# Altium PCB linkit-v4-1.1_6layers_smdonly.PcbDoc (part 1 of 5)
Units mm, origin at the board's own origin, x right, y up, seen from the top; angles counter-clockwise.
Board outline 70 x 35 mm, 6 copper layers (Top Layer, Int1 (GND), Int2 (Sign), Int3 (Sign), Int4 (PWR), Bottom Layer), stack 1.649 mm thick; 203 components, 154 nets, 694 pads, 939 vias.
Unrouted connection lines stored in the file: 1.
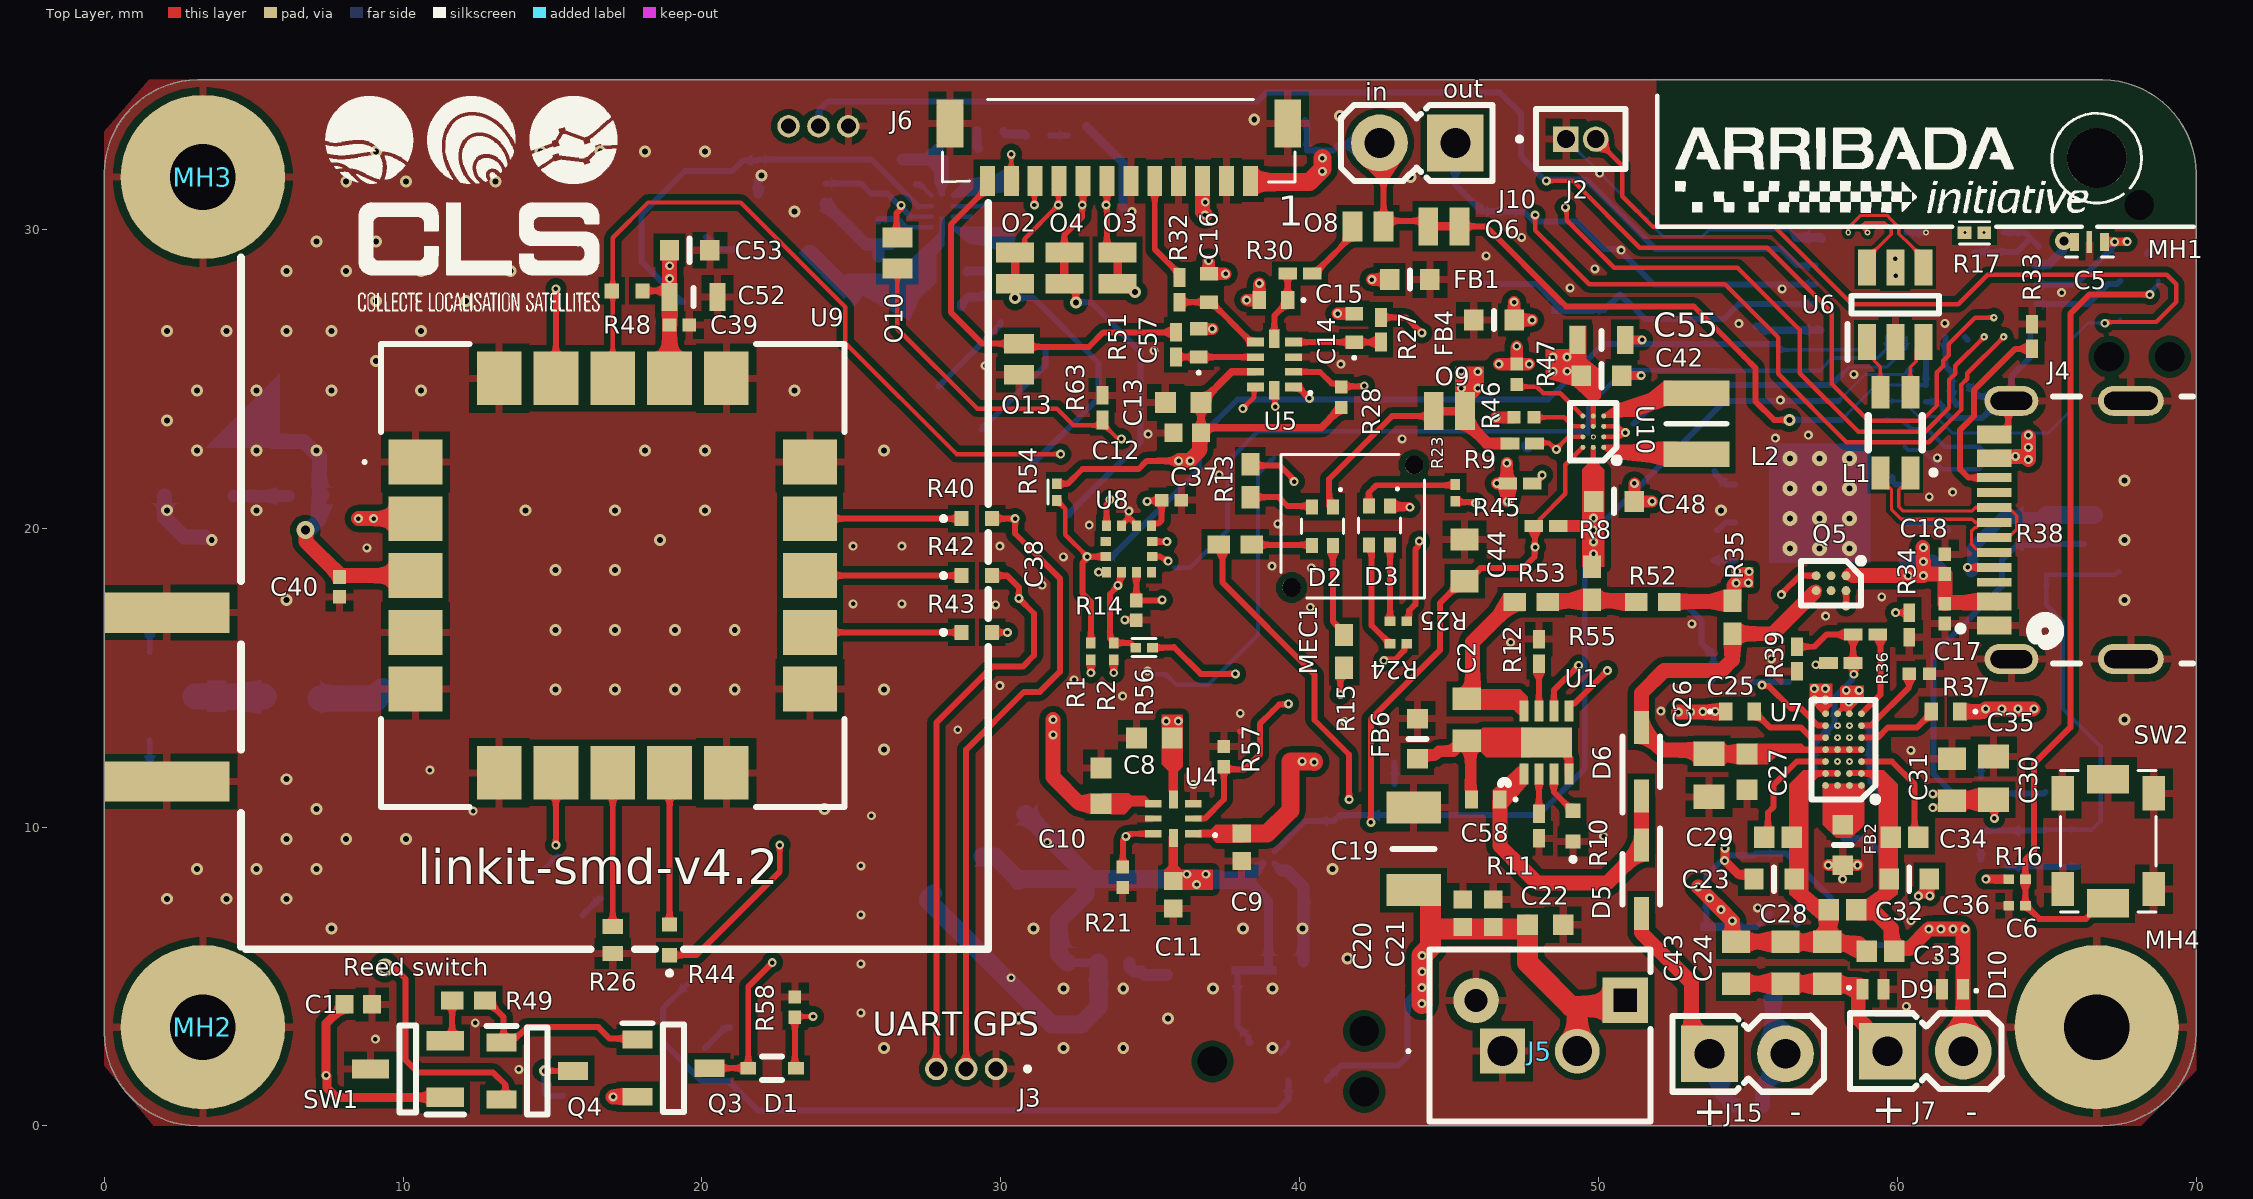
[diagram p0: Top Layer view]
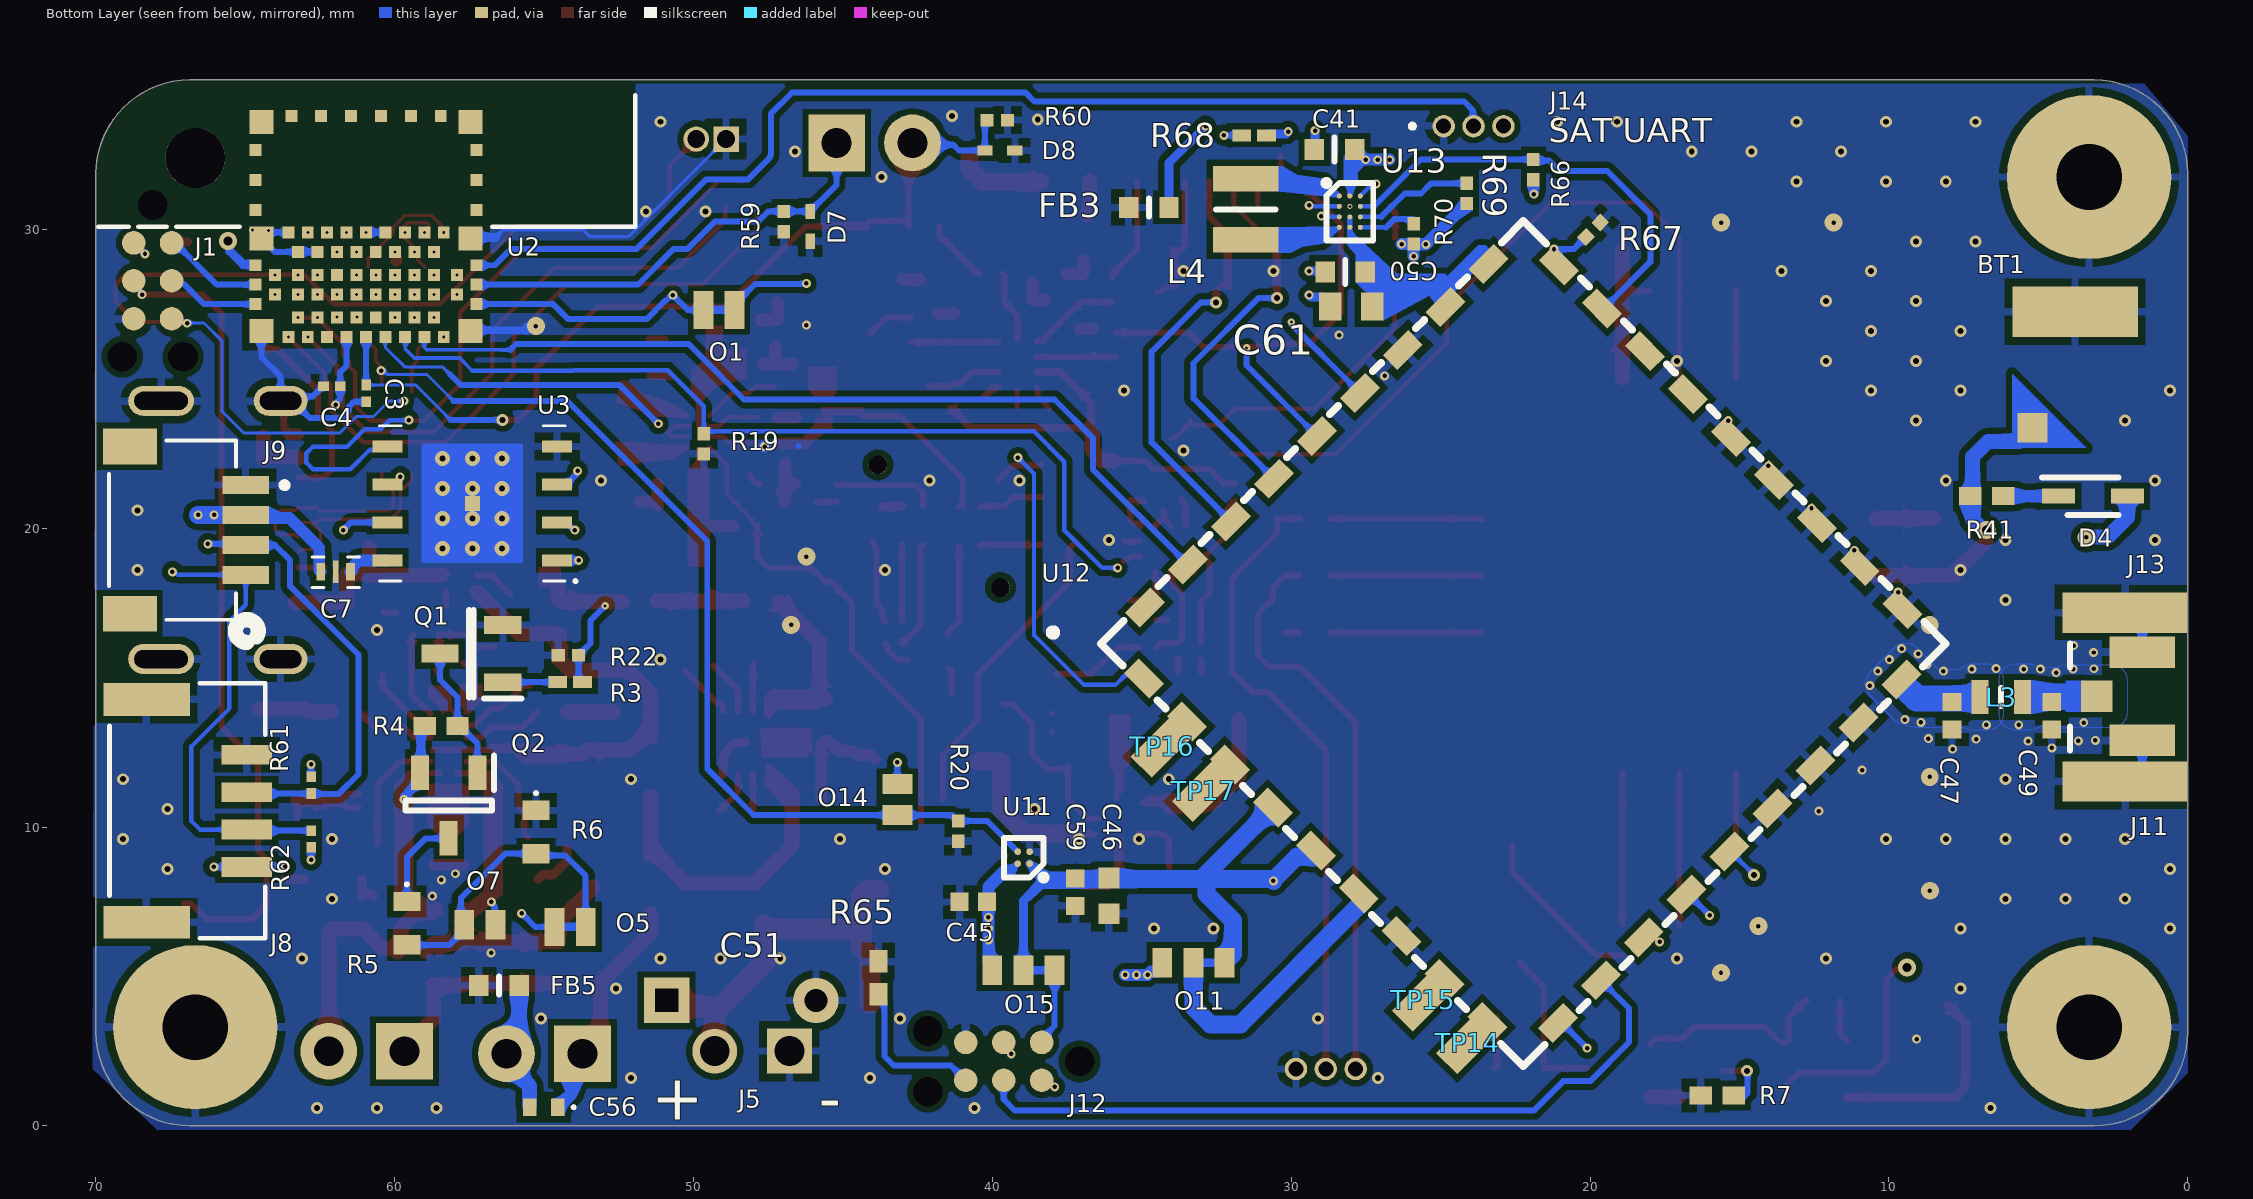
[diagram p1: Bottom Layer view, seen from below]
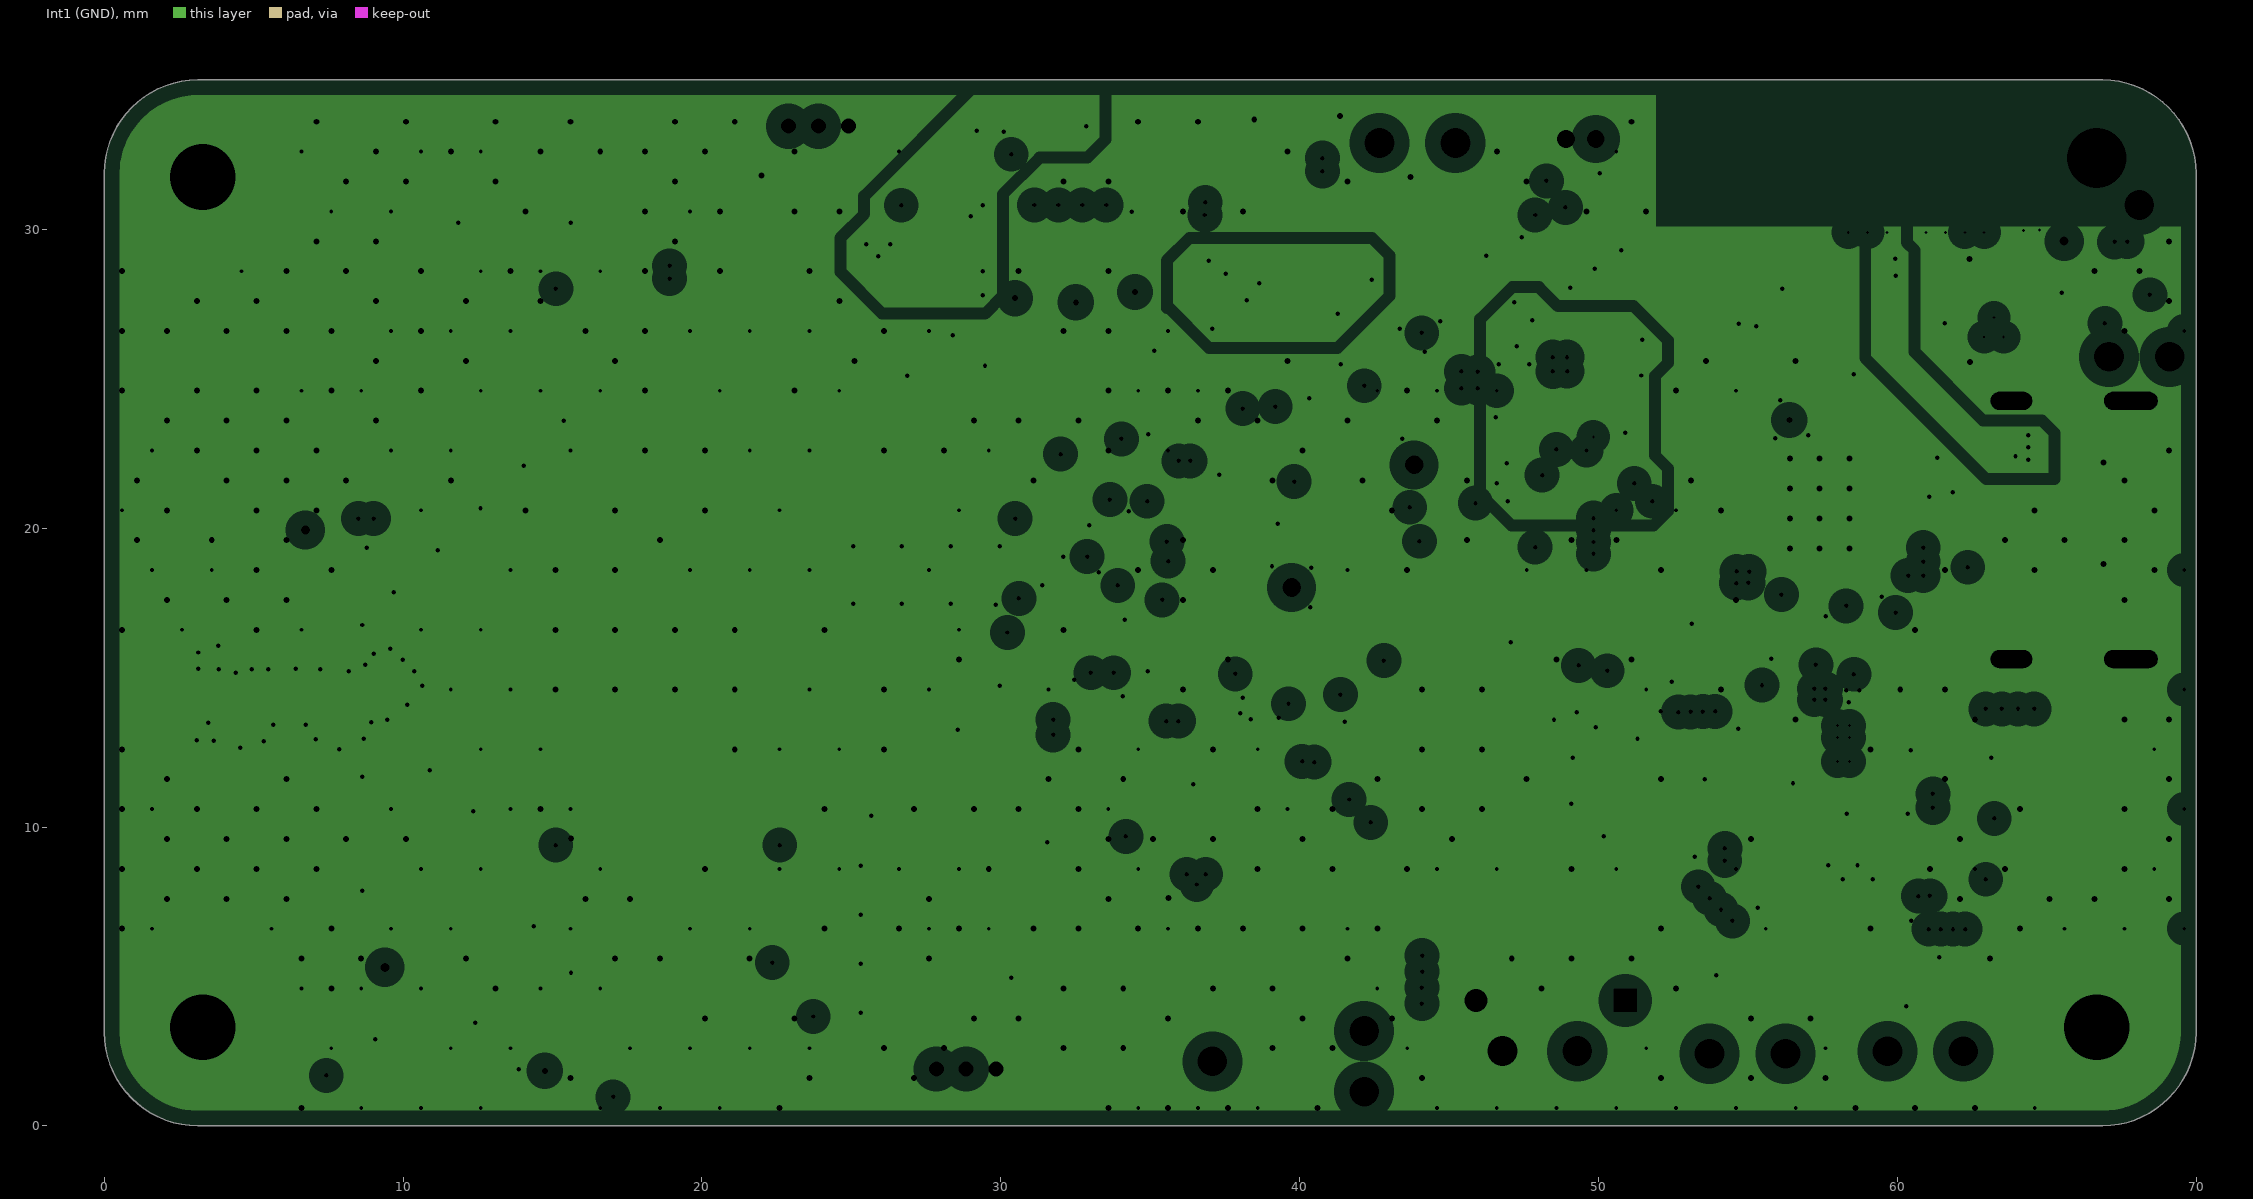
[diagram p2: Int1 (GND), clearances drawn from the general rule]
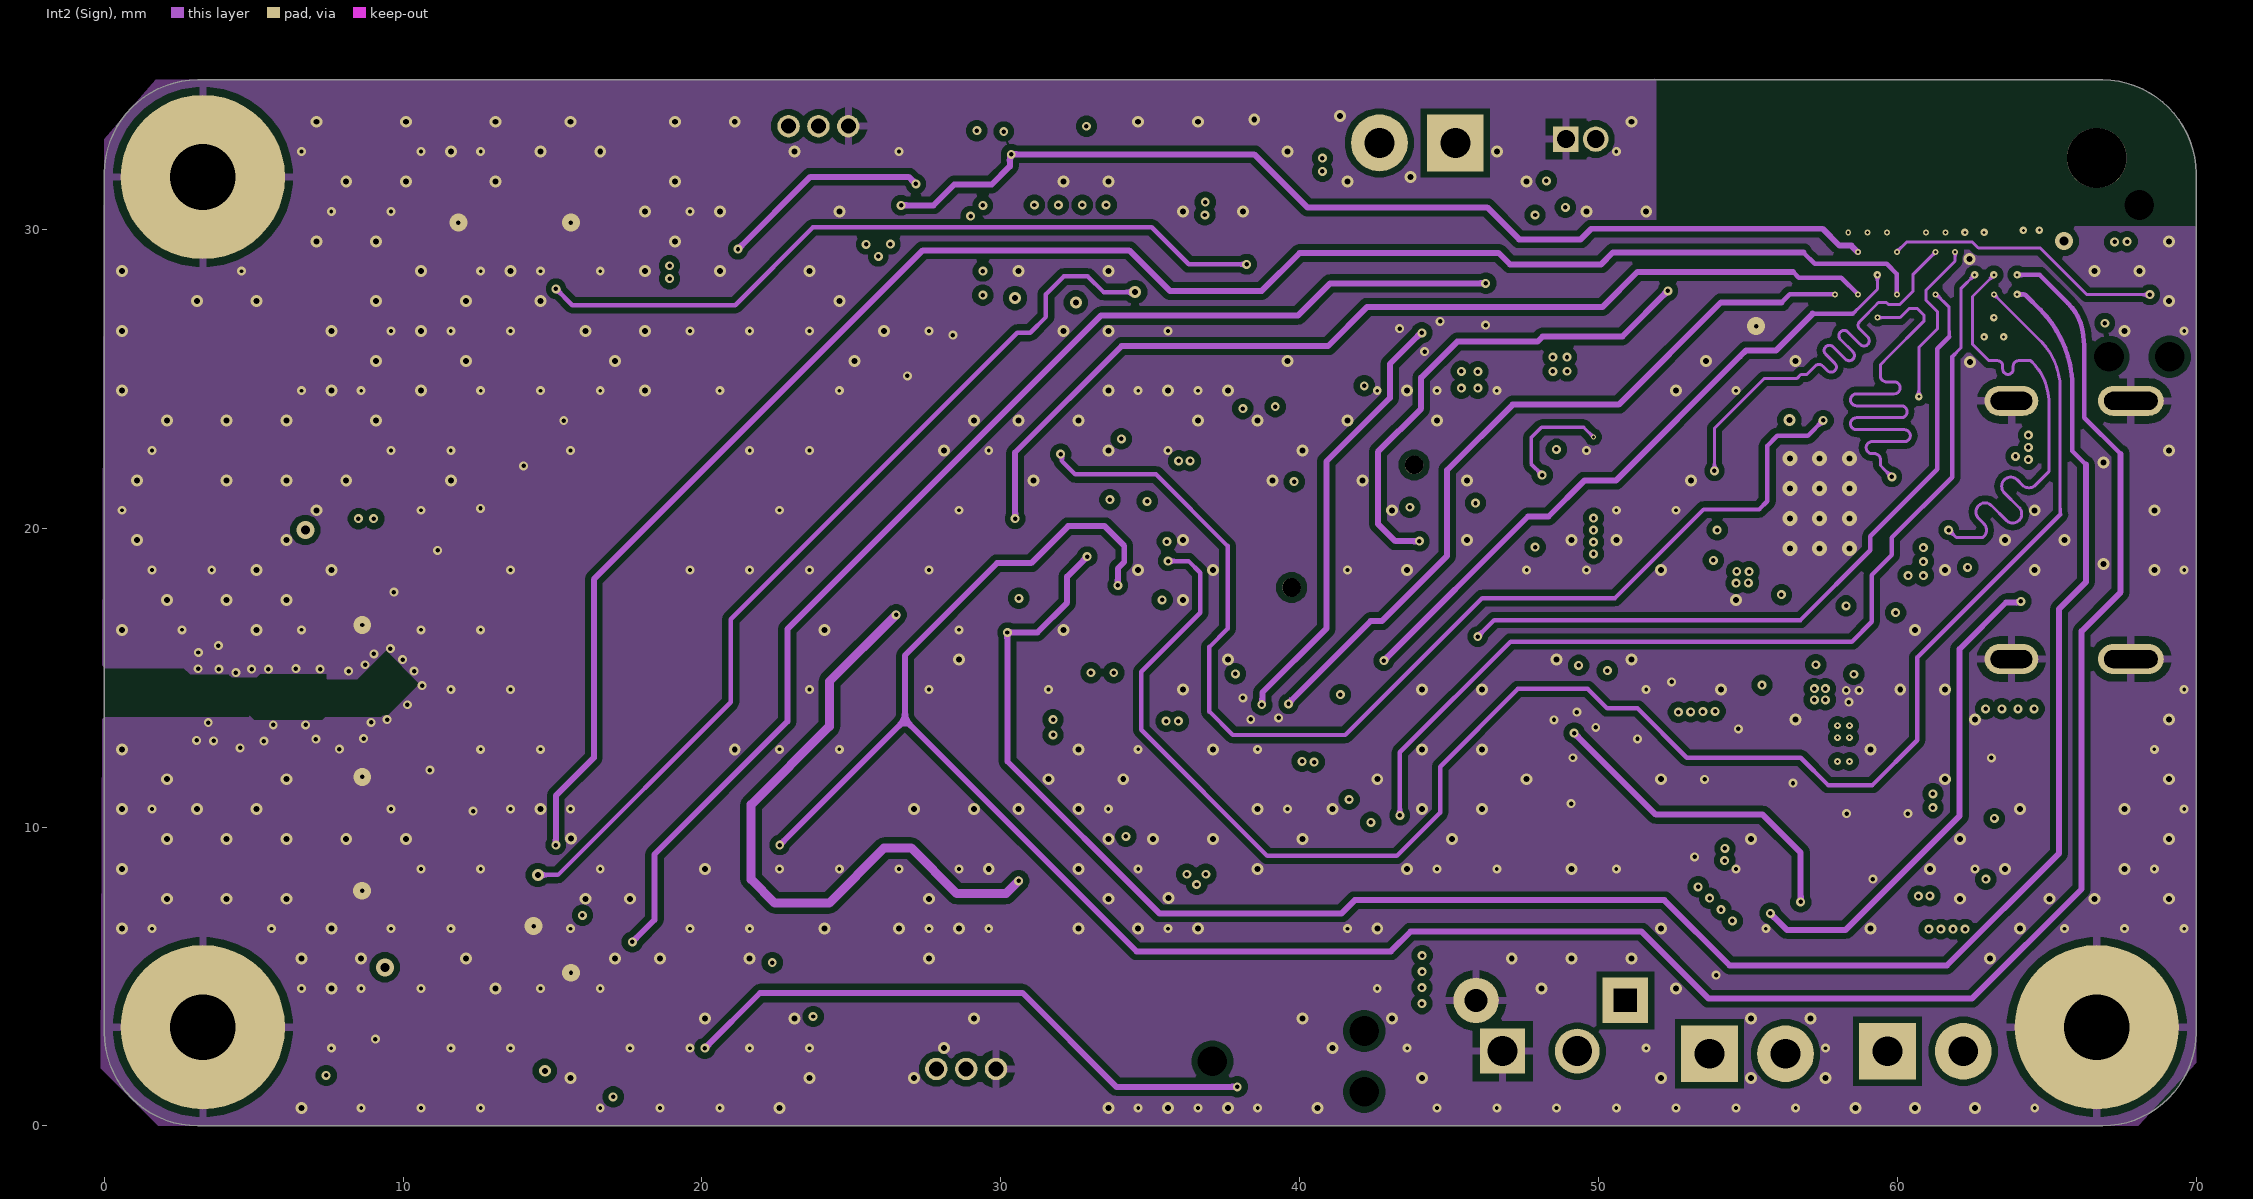
[diagram p3: Int2 (Sign)]
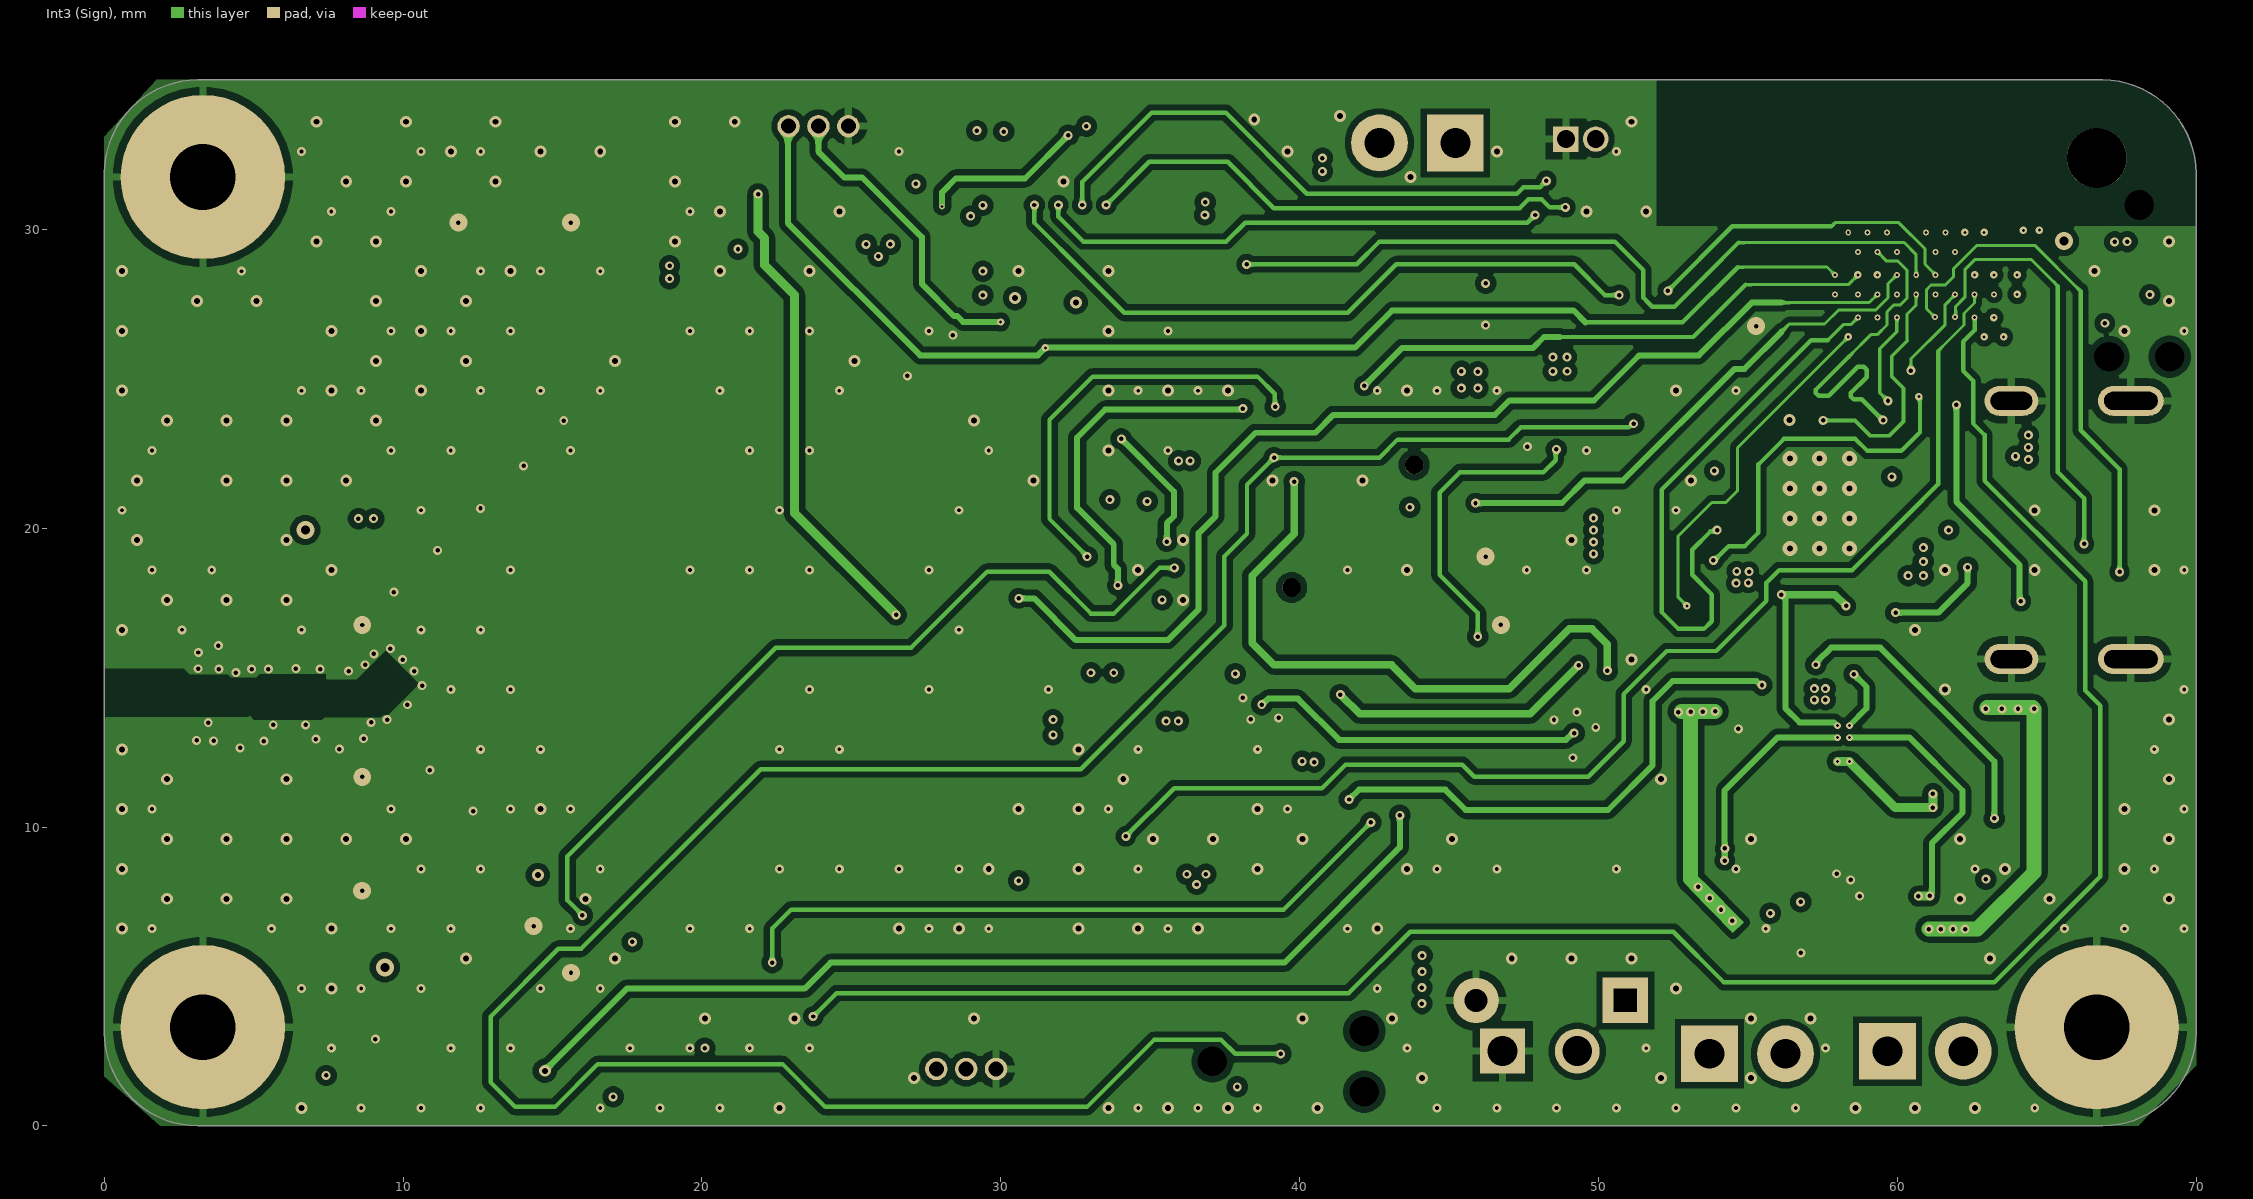
[diagram p4: Int3 (Sign)]
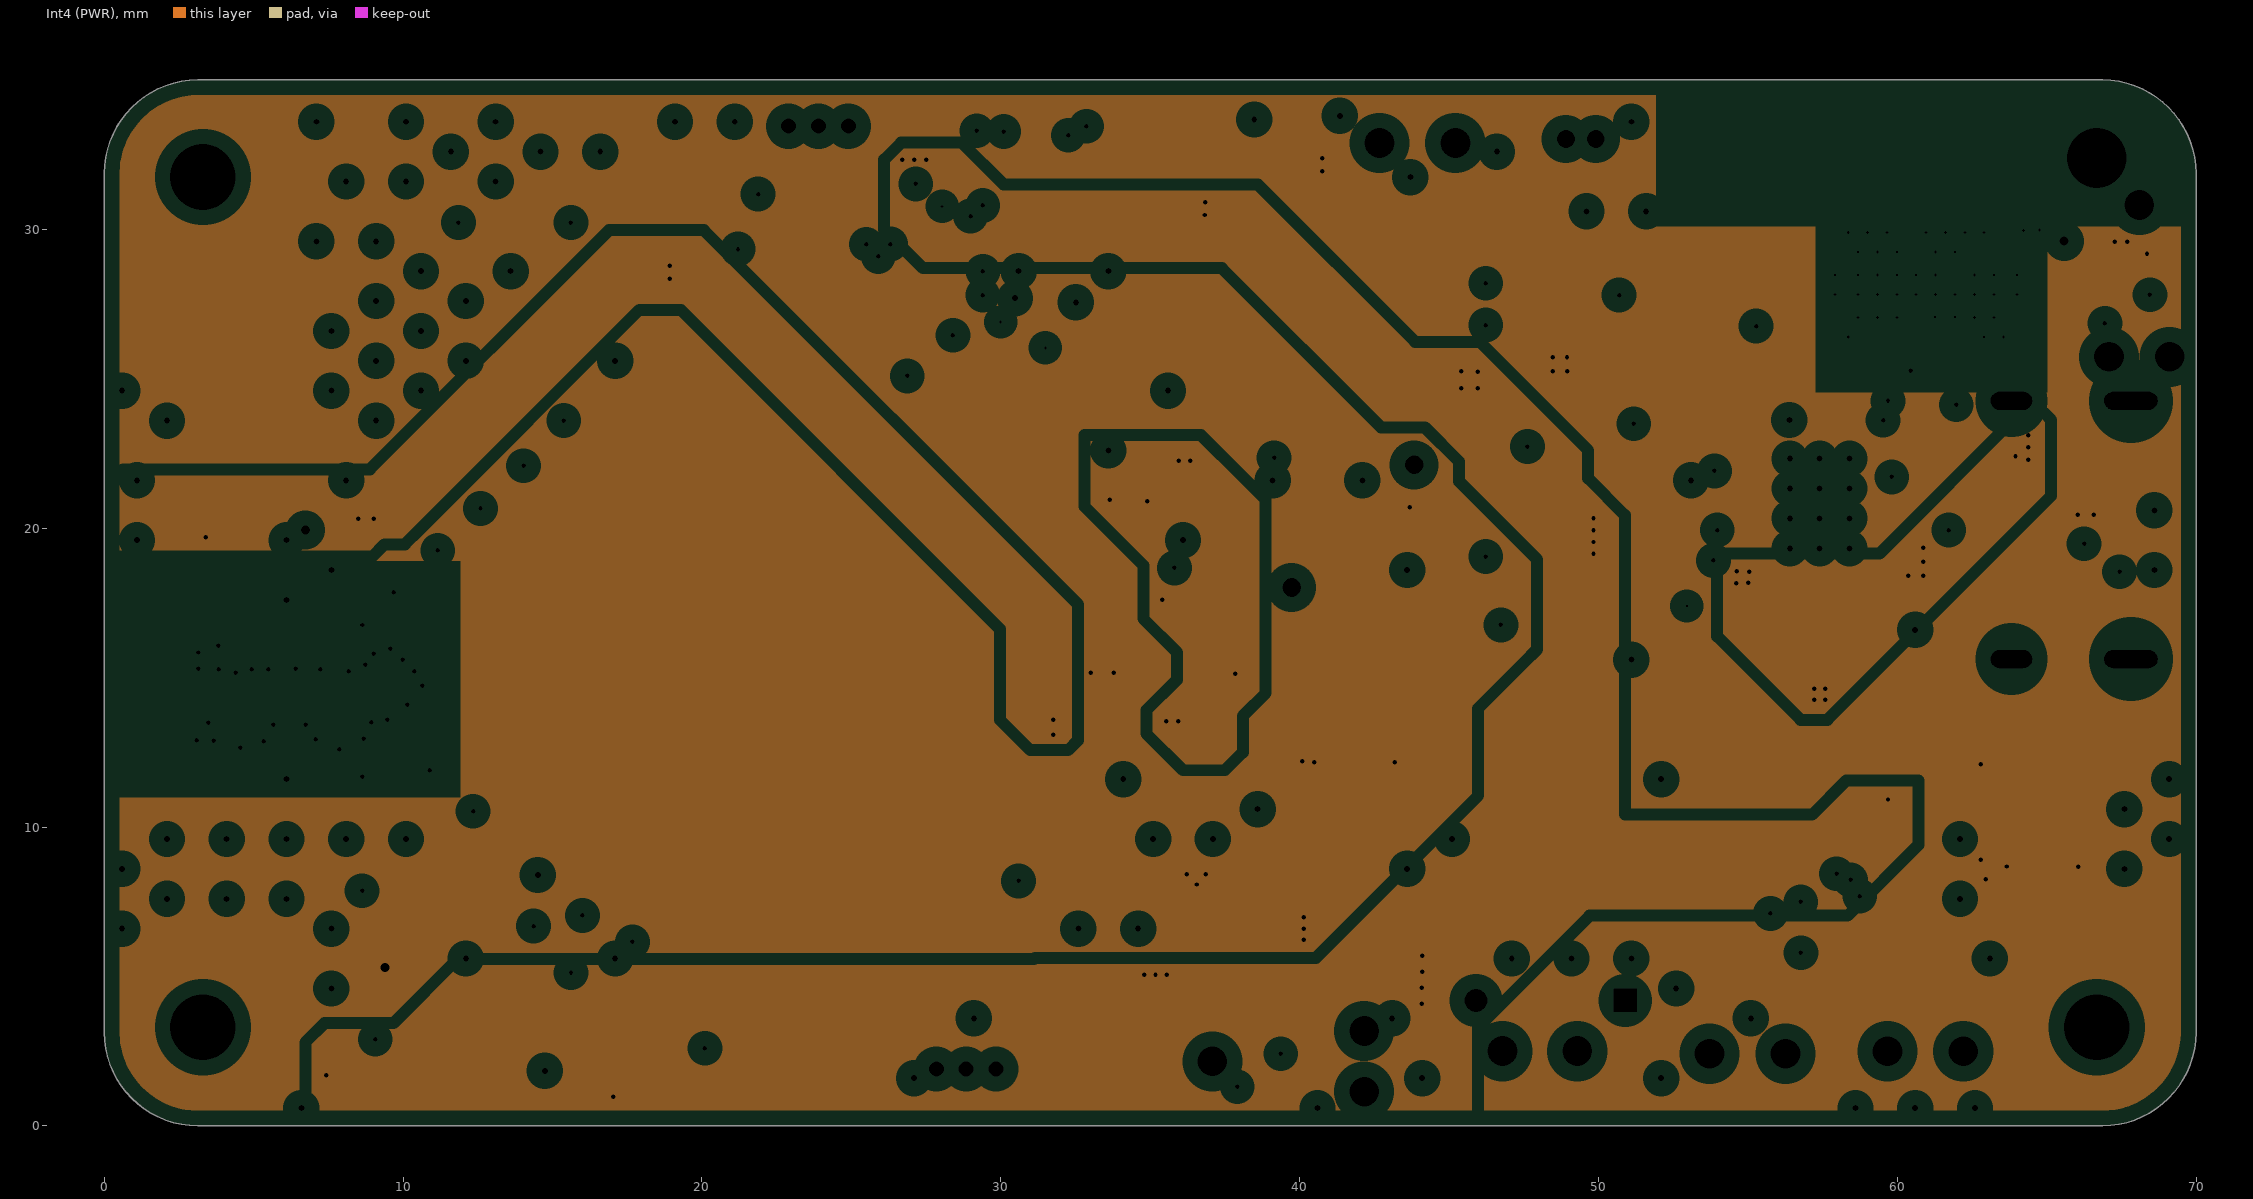
[diagram p5: Int4 (PWR), clearances drawn from the general rule]

## Layer stack, top to bottom
Top Solder: solder mask 0.0254, SM-003, Dk 4
Top Layer: signal copper 0.035
Dielectric 1: prepreg 0.1011, PP-015, Dk 4.3
Int1 (GND): plane copper 0.0175, net (Multiple Nets)
Dielectric 2: prepreg 0.0711, PP-006, Dk 4.1
Int2 (Sign): signal copper 0.035
Dielectric 3: core 1.13, Core-001-HCC, Dk 4.25
Int3 (Sign): signal copper 0.035
Dielectric 4: prepreg 0.0711, PP-006, Dk 4.1
Int4 (PWR): plane copper 0.0175, net (Multiple Nets)
Dielectric 5: prepreg 0.1011, PP-015, Dk 4.3
Bottom Layer: signal copper 0.035
Bottom Solder: solder mask 0.0254, SM-003, Dk 4

## Board outline
0,3.126 0,3.301 0,3.302 0,31.875 cw(c3.15,31.85) 3.125,35.001 3.125,35 66.875,35 66.875,35.001 cw(c66.85,31.85) 70,31.875 70,3.125 cw(c66.85,3.15) 66.875,0 3.125,0 cw(c3.15,3.151)

## Design rules (kind name [scope] priority, off if disabled: settings)
Clearance "Stitching GND" [IsStitchingVia and InNet('GND') vs (IsVia or IsStitchingVia Or IsPad) and InNet('GND')] p1: gap=0.5 ignorepadtopadclearanceinfootprint=FALSE
Clearance Clearance_1 [InDifferentialPairClass('USB')] p2: gap=0.126 ignorepadtopadclearanceinfootprint=FALSE
Clearance Clearance_50R [InNetClass('50R_Net') or InNetClass('50R_track') vs InNet('GND')] p3: gap=0.2 ignorepadtopadclearanceinfootprint=FALSE
Clearance Polygon_Clearance [InNamedPolygon('TOPGND')or InNamedPolygon('L2_GND')or InNamedPolygon('L3_GND')or InNamedPolygon('BOTGND')] p4: gap=0.2 ignorepadtopadclearanceinfootprint=FALSE
Clearance BGA_clearance_0.1 [WithinRoom('ISP1807')] p5: gap=0.1 ignorepadtopadclearanceinfootprint=FALSE
Clearance [All] p6: gap=0.15 ignorepadtopadclearanceinfootprint=FALSE
ComponentClearance ComponentClearance_option [(ObjectKind = 'Component') And ((Footprint = 'SMT-JUMPER_2_NC_TRACE_SILK')or(Footprint = 'SMT-JUMPER_2_NO_TRACE_SILK'))] p1: gap=0 collisioncheckmode=3 verticalgap=0 showdistances=FALSE donotcheckwithout3dbody=TRUE
ComponentClearance ComponentClearance_1 [HasFootprint('KIM2 FOOTPRINT')] p2: gap=0 collisioncheckmode=3 verticalgap=0 showdistances=FALSE
ComponentClearance [All] p3: gap=0.254 collisioncheckmode=3 verticalgap=0.254 showdistances=FALSE donotcheckwithout3dbody=TRUE
DiffPairsRouting [InDifferentialPairClass('USB')] p1: maxlimit=0.127 minlimit=0.127 mostfreqgap=0.127 toplayer_maxgap=0.127 toplayer_prefgap=0.127 toplayer_minwidth=0.112 toplayer_maxwidth=0.112 toplayer_prefwidth=0.112 midlayer1_mingap=0.127 midlayer1_minwidth=0.07 midlayer1_maxwidth=0.07 midlayer1_prefwidth=0.057 midlayer2_mingap=0.127 midlayer2_minwidth=0.07 midlayer2_maxwidth=0.07 midlayer2_prefwidth=0.057 bottomlayer_maxgap=0.127 bottomlayer_prefgap=0.127 bottomlayer_minwidth=0.112 bottomlayer_maxwidth=0.112 bottomlayer_prefwidth=0.112 impedanceprofiledriven=TRUE impedanceprofileid={9859EE02-7A4D-4AE4-9C0F-A4F87AE66AFC} impedanceprofilevalue=90.000000 maxuncoupledlength=12.7
HoleSize [All] p1: absolutevalues=TRUE maxlimit=2.54 minlimit=0.1 maxpercent=80.000 minpercent=20.000
HoleToHoleClearance [All] p1: gap=0.2 allowstackedmicrovias=TRUE
MaxMinImpedance "Schematic Impedance Constraint" [InNetClass('50R_Net')] p1: minimum=48.00 maximum=52.00
MaxMinImpedance "Schematic Impedance Constraint_2" [InDifferentialPairClass('USB')] p2: minimum=80.00 maximum=100.0
MaxMinImpedance "Schematic Impedance Constraint_1" [InNetClass('L1_Nets')] p3: minimum=80.00 maximum=100.0
MaxMinImpedance Satellite_1 [InNetClass('50R_Net') Or InNetClass('50R_track')] p4: minimum=48.00 maximum=52.00
MinimumSolderMaskSliver MinimumSolderMaskSliver_Sat_con [(Component = 'J13') vs (Component = 'J11')] p1: minsoldermaskwidth=0
MinimumSolderMaskSliver [All] p2: minsoldermaskwidth=0.1
PasteMaskExpansion PasteMaskExpansion_GNSS [InComponent('U9')] p1: expansion=0 percent=-12.000000
PasteMaskExpansion [All] p2: expansion=0
PlaneClearance [All] p1: clearance=0.508
PlaneConnect PlaneConnect_PWR [InNetClass('Power')] p1: pad.planeconnectstyle=Relief pad.reliefexpansion=0.508 pad.reliefentries=4 pad.reliefconductorwidth=0.254 pad.reliefairgap=0.254 via.planeconnectstyle=Direct via.reliefexpansion=0.508 via.reliefentries=4 via.reliefconductorwidth=0.254 via.reliefairgap=0.254
PlaneConnect PlaneConnect_2 [InNet('GND')] p2: pad.planeconnectstyle=Relief pad.reliefexpansion=0.508 pad.reliefentries=4 pad.reliefconductorwidth=0.254 pad.reliefairgap=0.254 via.planeconnectstyle=Direct via.reliefexpansion=0.508 via.reliefentries=4 via.reliefconductorwidth=0.254 via.reliefairgap=0.254
PlaneConnect PlaneConnect_1 [InNet('PGND1')] p3: pad.planeconnectstyle=Relief pad.reliefexpansion=0.508 pad.reliefentries=4 pad.reliefconductorwidth=0.254 pad.reliefairgap=0.254 via.planeconnectstyle=Direct via.reliefexpansion=0.508 via.reliefentries=4 via.reliefconductorwidth=0.254 via.reliefairgap=0.254
PlaneConnect [All] p4: planeconnectstyle=Direct reliefexpansion=0.508 reliefentries=4 reliefconductorwidth=0.254 reliefairgap=0.254
PolygonConnect PolygonConnect_GND [InNet('GND')] p1: thpad.connectstyle=Relief thpad.reliefconductorwidth=0.254 thpad.reliefentries=4 thpad.polygonreliefangle="90 Angle" thpad.airgapwidth=0.254 smdpad.connectstyle=Relief smdpad.reliefconductorwidth=0.254 smdpad.reliefentries=4 smdpad.polygonreliefangle="90 Angle" smdpad.airgapwidth=0.254 via.connectstyle=Direct via.reliefconductorwidth=0.254 via.reliefentries=4 via.polygonreliefangle="90 Angle" via.airgapwidth=0.254
PolygonConnect [All] p2: connectstyle=Relief reliefconductorwidth=0.254 reliefentries=4 polygonreliefangle="90 Angle" airgapwidth=0.254
RoomDefinition BMA400 [InComponentClass('BMA400') vs False] p1: confinementstyle=ConfineIn formatcopy=TRUE lockcomponents=FALSE outline 36.068,21.082 32.639,21.082 32.639,17.78 36.068,17.78
RoomDefinition "BQ51003YFPT WirelessCharger" [InComponentClass('BQ51003YFPT WirelessCharger') vs False] p2: confinementstyle=ConfineIn formatcopy=TRUE lockcomponents=FALSE outline 62.611,17.907 54.61,17.907 54.61,6.096 62.611,6.096
RoomDefinition SAM-M10Q [InComponentClass('SAM-M10Q') vs False] p3: confinementstyle=ConfineIn formatcopy=TRUE lockcomponents=FALSE outline 4.572,30.607 29.337,30.607 29.337,6.223 4.572,6.223
RoomDefinition "TPS63901 3V3&2V31" [InComponentClass('TPS63901 3V3&2V31')] p4: confinementstyle=ConfineIn formatcopy=TRUE lockcomponents=FALSE outline -25.4,-25.4 25.4,-25.4 25.4,0 -25.4,0
RoomDefinition "TPS63901 3V3&2V32" [InComponentClass('TPS63901 3V3&2V32')] p5: confinementstyle=ConfineIn formatcopy=TRUE lockcomponents=FALSE outline 48.641,21.717 50.927,21.717 50.927,24.638 48.641,24.638
RoomDefinition ISP1807 [InComponentClass('ISP1807') vs False] p6: confinementstyle=ConfineIn formatcopy=TRUE lockcomponents=FALSE outline 48.706,25.745 48.706,34.853 73.214,34.853 73.214,25.745
RoomDefinition Sensors [InComponentClass('Sensors') vs False] p7: confinementstyle=ConfineIn formatcopy=TRUE lockcomponents=FALSE outline 55.756,16.382 55.756,19.94 59.814,19.94 59.814,16.382
RoomDefinition Satellite [InComponentClass('Satellite')] p8: confinementstyle=ConfineIn formatcopy=TRUE lockcomponents=FALSE outline -0.127,20.066 47.117,20.066 47.117,0 -0.127,0
RoomDefinition Power [InComponentClass('Power') vs False] p9: confinementstyle=ConfineIn formatcopy=TRUE lockcomponents=FALSE outline 50.292,16.129 45.466,16.129 45.466,8.636 50.292,8.636
RoomDefinition Interface [InComponentClass('Interface') vs False] p10: confinementstyle=ConfineIn formatcopy=TRUE lockcomponents=FALSE outline 47.498,35.179 25.4,35.179 25.4,29.083 47.498,29.083
RoutingVias RoutingVias_1 [All] p1: holewidth=0.4 width=0.8 viastyle="Through Hole" minholewidth=0.1 minwidth=0.15 maxholewidth=2 maxwidth=2
SilkToSolderMaskClearance [IsPad] p1: minsilkscreentomaskgap=0.09 clearancetoexposedcopper=TRUE
SolderMaskExpansion SolderMaskExpansion_2 [InComponent('U5')or InComponent('J2')] p1: expansion=0.02 istentingtop=FALSE
SolderMaskExpansion [IsVia] p2: expansion=0.102 istentingtop=TRUE
SolderMaskExpansion SolderMaskExpansion_1 [All] p3: expansion=0.035 istentingtop=FALSE useseparateexpansions=TRUE expansionbottom=0.035 istentingbottom=FALSE
SupplyNets "Schematic Supply Nets_5" [InNet('VSYS_SMD')] p1: voltage=0.000
SupplyNets "Schematic Supply Nets_2" [InNet('PGND4')] p2: voltage=0.000
SupplyNets "Schematic Supply Nets_13" [InNet('PGND3')] p3: voltage=0.000
SupplyNets "Schematic Supply Nets_12" [InNet('AGND')] p4: voltage=0.000
SupplyNets "Schematic Supply Nets_11" [InNet('PGND1')] p5: voltage=0.000
SupplyNets "Schematic Supply Nets_9" [InNet('GND')] p6: voltage=0.000
SupplyNets "Schematic Supply Nets_8" [InNet('VSENS_2')] p7: voltage=0.000
SupplyNets "Schematic Supply Nets_7" [InNet('VBUS')] p8: voltage=0.000
SupplyNets "Schematic Supply Nets_3" [InNet('VSENS_1')] p9: voltage=0.000
SupplyNets "Schematic Supply Nets_1" [InNet('VSYS')] p10: voltage=0.000
SupplyNets "Schematic Supply Nets" [InNet('VBAT')] p11: voltage=0.000
Width "Schematic Width Constraint_12" [InNetClass('Power')] p1: maxlimit=1 minlimit=0.2 preferedwidth=0.5 midlayer1_prefwidth=0.254 midlayer2_prefwidth=0.254 minimp=50.000000 maximp=50.000000 favimp=50.000000
Width Width_50R [(InNetClass('50R_Net') or InNetClass('50R_track')) and not(InNet('GND'))] p2: maxlimit=0.87 minlimit=0.114 preferedwidth=0.87 toplayer_minwidth=0.347 toplayer_maxwidth=0.347 toplayer_prefwidth=0.347 midlayer1_maxwidth=0.114 midlayer1_prefwidth=0.078 midlayer2_maxwidth=0.114 midlayer2_prefwidth=0.078 bottomlayer_minwidth=0.87 impedanceprofiledriven=TRUE impedanceprofileid={F9304162-404A-44E2-9895-C2B8E0A9A055} impedanceprofilevalue=50.000000 minimp=50.000000 maximp=50.000000 favimp=50.000000
Width Width_ISP [WithinRoom('ISP1807')] p3: maxlimit=0.4 minlimit=0.1 preferedwidth=0.1 minimp=50.000000 maximp=50.000000 favimp=50.000000
Width "Schematic Width Constraint_9" [InNet('NetC5_2')] p4: maxlimit=1 minlimit=0.254 preferedwidth=0.5 toplayer_minwidth=0.4 midlayer1_maxwidth=0.254 midlayer1_prefwidth=0.254 midlayer2_maxwidth=0.254 midlayer2_prefwidth=0.254 bottomlayer_minwidth=0.4 minimp=50.000000 maximp=50.000000 favimp=50.000000
Width "Schematic Width Constraint" [InNet('NetC5_2')] p5: maxlimit=0.254 minlimit=0.254 preferedwidth=0.254
Width [All] p6: maxlimit=1 minlimit=0.1 preferedwidth=0.2 minimp=50.000000 maximp=50.000000 favimp=50.000000
21 further rules are at their usual default settings.

## Classes and differential pairs
net class C48_Nets: PGND1 VBAT
net class C41_Nets: PGND1 VBAT
net class C61_Nets: PGND1 "VOUT_TPS63901 3V3&2V32"
net class C59_Nets: GND VSYS_SMD
net class C55_Nets: PGND1 VSYS
net class C53_Nets: GND VSENS_2
net class C52_Nets: GND VSENS_2
net class C51_Nets: GND VBAT
net class R48_Nets: GPS_NRST VSENS_2
net class TP17_Nets: SMD_SCL
net class TP16_Nets: SMD_SDA
net class TP15_Nets: SMD_RF_NRST
net class TP14_Nets: SMD_RF_BUSY
channel class TPS63901_BuckBoost_lowIq_3V3&2V3_400mA: "TPS63901 3V3&2V31" "TPS63901 3V3&2V32"
net class U13_Nets: "LX1_TPS63901 3V3&2V32" "LX2_TPS63901 3V3&2V32" NetR68_1 NetR69_1 NetR70_2 PGND1 "SEL_TPS63901 3V3&2V32" VBAT "VOUT_TPS63901 3V3&2V32" VPA_EN
net class R70_Nets: NetR70_2 PGND1
net class R69_Nets: NetR69_1 PGND1
net class R68_Nets: NetR68_1 PGND1
net class R67_Nets: GND VPA_EN
net class R66_Nets: "SEL_TPS63901 3V3&2V32" VSYS_SMD
net class R65_Nets: GND NetJ12_6
net class R8_Nets: VBAT VSYS_EN
net class L4_Nets: "LX1_TPS63901 3V3&2V32" "LX2_TPS63901 3V3&2V32"
net class FB3_Nets: GND PGND1
net class C50_Nets: PGND1 "VOUT_TPS63901 3V3&2V32"
net class C38_Nets: GND VSENS_1
component class "TPS63901 3V3&2V32": C48 C50 C61 FB3 L4 R68 R69 R70 U13
net class U11_Nets: GND SAT_EN VSYS VSYS_SMD
net class C46_Nets: GND VSYS_SMD
component class SMD: C45 C46 C59 O11 R66 R67 U11 U12
net class O10_Nets: GPIO INT2_IMU
net class O13_Nets: ADC3 GND
net class FB6_Nets: GND PGND4
net class R63_Nets: GND INT2_IMU
net class R62_Nets: EXT_SCL VSYS
net class R61_Nets: EXT_SDA VSYS
net class R60_Nets: GND SWS_IN
net class R59_Nets: GND SLOW_SWS_SEND
net class R58_Nets: GND POWER_CONTROL
net class R57_Nets: GND VADC_EN
net class R56_Nets: I2C_SDA VSENS_1
net class R54_Nets: I2C_SCL VSENS_1
net class D10_Nets: COIL-2 GND
net class D9_Nets: COIL-1 GND
net class D8_Nets: GND SWS_IN
net class D7_Nets: GND SLOW_SWS_SEND
net class C43_Nets: COIL-1 NetC23_1
net class L3_Nets: NetC49_2 NetL2_1 NetL2_2 SMD_ANT
net class SPI: SPI_CLK SPI_MISO SPI_MOSI
net class QSPI: QSPI_CLK QSPI_IO0 QSPI_IO1 QSPI_IO2 QSPI_IO3
differential pair class USB: USB USB_D USB_L
net class C33_Nets: COIL-2 NetC23_1
net class FB2_Nets: GND PGND3
net class D6_Nets: NetC58_1 RX-OUT
net class R55_Nets: NetR52_1 VBAT
net class D5_Nets: NetC58_1 SPV+
net class R53_Nets: NetC2_2 NetR52_1
net class R52_Nets: NetR52_1 VBUS
net class MH4_Nets: GND NetMH4_1
net class MH3_Nets: GND NetMH3_1
net class MH2_Nets: GND NetMH2_1
net class FB5_Nets: GND SPV-
net class R51_Nets: ADC3 NetC57_1
net class J15_Nets: SPV+ SPV-
net class J14_Nets: GND SAT_UART_RX SAT_UART_TX
net class C58_Nets: NetC58_1 PGND4
net class C57_Nets: AGND NetC57_1
net class FB1_Nets: AGND GND
net class C56_Nets: SPV+ SPV-
net class FB4_Nets: GND PGND1
net class Satellite_Nets: NetC49_2 NetJ12_1 NetJ12_6 NetU13_11 NetU13_12
net class U12_Nets: GND NetO11_2 NetU11_20 NetU11_22 NetU11_23 NetU11_25 NetU11_27 NetU11_28 NetU11_44 NetU11_46 NetU11_48 nRESET-SAT SAT_INT SAT_SPI_MISO SAT_SPI_MOSI SAT_SPI_NSS SAT_SPI_SCK SAT_SWCLK SAT_SWDIO SAT_UART_RX SAT_UART_TX SAT_WKUP "SEL_TPS63901 3V3&2V32" SMD_ANT SMD_PB13 SMD_RF_BUSY SMD_RF_NRST SMD_SCL SMD_SDA "VOUT_TPS63901 3V3&2V32" VPA_EN VSYS_SMD
net class U10_Nets: "LX1_TPS63901 3V3&2V31" "LX2_TPS63901 3V3&2V31" NetR45_1 NetR46_1 NetR47_2 PGND1 VBAT VCC_SEL VSYS VSYS_EN
net class U9_Nets: GND GPS_INT GPS_NRST GPS_PPS NetBT1_+ NetR40_1 NetR42_1 NetR43_1 NetR44_2 SAFE VSENS_2
net class U8_Nets: GND I2C_SCL I2C_SDA INT1_IMU INT2_IMU NetU8_4 NetU8_11 VSENS_1
net class U7_Nets: BOOT1 BOOT2 CLAMP1 CLAMP2 COIL-2 COMM1 COMM2 GND NetC23_1 NetC30_1 NetQ5_A2 NetR36_2 NetR37_1 NetR38_2 PGND3 RX-OUT VBUS WIRELESS_NCHG_LED
net class U6_Nets: GND USB_D_N USB_D_P USB_L_N USB_L_P VBUS
net class U5_Nets: ADC_ALERT_RDY GND I2C_SCL I2C_SDA NetC14_1 NetC15_1 NetC16_1 NetC57_1 NetU5_7 VSENS_1
net class U4_Nets: GND GPS_PWR_EN VADC_EN VSENS_1 VSENS_2 VSYS
net class U3_Nets: GND NetC7_2 QSPI_CLK QSPI_CS QSPI_IO0 QSPI_IO1 QSPI_IO2 QSPI_IO3
net class U2_Nets: ADC_ALERT_RDY BAT_AN BAT_READ_EN EXT_SCL EXT_SDA GND GPIO GPS_INT GPS_NRST GPS_PPS GPS_PWR_EN GPS_UART_RX GPS_UART_TX I2C_SCL I2C_SDA INT1_IMU KIM_PWR_ON LED_B LED_G LED_R NetC5_2 NetR17_1 NetR17_2 NetU2_48 NetU2_59 NetU2_65 NetU2_66 NetU2_67 NetU2_68 NetU2_69 NetU2_70 NetU2_71 NetU2_72 NetU2_73 NetU2_74 NetU2_75 NetU2_76 NetU2_77 NetU2_78 nRESET nRESET-SAT NRF_DBG POWER_CONTROL QSPI_CLK QSPI_CS QSPI_IO0 QSPI_IO1 QSPI_IO2 QSPI_IO3 REED_MCU SAT_EN SAT_INT SAT_UART_RX SAT_UART_TX SAT_WKUP SLOW_SWS_SEND SPI_CLK SPI_MISO SPI_MOSI SPI_NSS SWDCLK SWDIO SWS USB_D_N USB_D_P VADC_EN VBUS VCC_SEL
net class U1_Nets: NetC2_2 NetC58_1 NetR10_2 NetR11_2 NetR12_2 NPG_LED PGND4 STAT_LED
net class SW2_Nets: GND nRESET
net class SW1_Nets: GND NetR49_2 VBAT
net class Sensors_Nets: ADC0 ADC1 ADC2 ADC3 ADC_ALERT_RDY AGND GND GPS_INT GPS_NRST GPS_PPS GPS_PWR_EN GPS_UART_RX GPS_UART_TX I2C_SCL I2C_SDA INT1_IMU INT2_IMU NetC14_1 NetC15_1 NetC16_1 NetC57_1 NetU5_7 SAFE VADC_EN VSENS_1 VSENS_2 VSYS
net class R49_Nets: NetQ3_1 NetR49_2
net class R47_Nets: NetR47_2 PGND1
net class R46_Nets: NetR46_1 PGND1
net class R45_Nets: NetR45_1 PGND1
net class R44_Nets: I2C_SDA NetR44_2
net class R43_Nets: I2C_SCL NetR43_1
net class R42_Nets: GPS_UART_TX NetR42_1
net class R41_Nets: NetBT1_+ NetD4_1
net class R40_Nets: GPS_UART_RX NetR40_1
net class R39_Nets: GND NetR36_2
net class R38_Nets: NetR36_2 NetR38_2
net class R37_Nets: GND NetR37_1
net class R36_Nets: NetC30_1 NetR36_2
net class R35_Nets: RX-OUT VBUS
net class R34_Nets: GND NetJ4_A5
net class R33_Nets: GND NetJ4_B5
net class R32_Nets: ADC2 NetC16_1
net class R30_Nets: ADC1 NetC15_1
net class R27_Nets: ADC0 NetC14_1
net class R26_Nets: GND SAFE
net class R25_Nets: LED_G NetD3_4
net class R24_Nets: LED_B NetD3_3
net class R23_Nets: LED_R NetD3_2
net class R22_Nets: BAT_READ_EN GND
net class R21_Nets: GND GPS_PWR_EN
net class R28_Nets: ADC_ALERT_RDY VSENS_1
net class R20_Nets: GND SAT_EN
net class R19_Nets: GND SAT_WKUP
net class R17_Nets: NetR17_1 NetR17_2
net class R16_Nets: nRESET VSYS
net class R15_Nets: NetD2_4 NPG_LED
net class R14_Nets: NetD2_3 WIRELESS_NCHG_LED
net class R13_Nets: NetD2_2 STAT_LED
net class R12_Nets: GND NetR12_2
net class R11_Nets: GND NetR11_2
net class R10_Nets: GND NetR10_2
net class R9_Nets: VBAT VCC_SEL
net class C44_Nets: GND VSYS_EN
net class R7_Nets: GND REED_MCU
net class R6_Nets: GND VBAT_SENSE
net class R5_Nets: NetQ2_3 VBAT_SENSE
net class R4_Nets: NetQ1_3 VBAT
net class R3_Nets: BAT_READ_EN NetQ1_1
net class R2_Nets: I2C_SDA VSYS
net class R1_Nets: I2C_SCL VSYS
net class Q5_Nets: NetQ5_A2 NetQ5_B1 NetQ5_B2 RX-OUT VBUS
net class Q4_Nets: NetQ3_1 REED_MCU VSYS
net class Q3_Nets: NetQ3_1 VBAT VSYS_EN
net class Q2_Nets: NetQ1_3 NetQ2_3 VBAT
net class Q1_Nets: GND NetQ1_1 NetQ1_3
net class Power: COIL-2 NetC2_2 NetC23_1 NetC58_1 NetR52_1 RX-OUT SPV+ SPV- VBAT VBUS
net class Power_Nets: COIL-1 COIL-2 GND NetC2_2 NetC58_1 NetD2_1 NetD2_2 NetD2_3 NetD2_4 NetQ3_1 NetR10_2 NetR11_2 NetR12_2 NetR49_2 NetR52_1 NPG_LED PGND4 POWER_CONTROL REED_MCU RX-OUT SPV+ SPV- STAT_LED VBAT VBUS VCC_SEL VSYS VSYS_EN WIRELESS_NCHG_LED
net class O14_Nets: SAT_EN VSYS
net class O15_Nets: NetJ12_1 VSYS VSYS_SMD
net class O11_Nets: NetO11_2 VBAT VSYS_SMD
net class O9_Nets: NetD2_1 VBAT
net class O8_Nets: ADC1 SWS_IN
net class O7_Nets: ADC0 VBAT_SENSE
net class O6_Nets: SWS SWS_IN
net class O5_Nets: BAT_AN VBAT_SENSE
net class O4_Nets: SAT_SPI_MISO SPI_MISO
net class O3_Nets: SAT_SPI_MOSI SPI_MOSI
net class O2_Nets: SAT_SPI_SCK SPI_CLK
net class O1_Nets: SAT_SPI_NSS SPI_NSS
net class 50R_Net: GND NetC49_2 NetL2_1 NetL2_2 SMD_ANT
net class L2_Nets: "LX1_TPS63901 3V3&2V31" "LX2_TPS63901 3V3&2V31"
net class L1_Nets: USB_L_N USB_L_P USB_N USB_P
net class J13_Nets: GND NetC49_2
net class J12_Nets: GND NetJ12_1 NetJ12_6 nRESET-SAT SAT_SWCLK SAT_SWDIO
net class J11_Nets: GND NetC49_2
net class J10_Nets: SLOW_SWS_SEND SWS_IN
net class J9_Nets: EXT_SCL EXT_SDA GND VSYS
net class J8_Nets: EXT_SCL EXT_SDA GND VSYS
net class J7_Nets: COIL-1 COIL-2
net class J6_Nets: ADC2 ADC3 GND GPIO SPI_CLK SPI_MISO SPI_MOSI SPI_NSS VBAT VSYS
net class J5_Nets: GND VBAT
net class J4_Nets: GND NetJ4_A5 NetJ4_A8 NetJ4_B5 NetJ4_B8 USB_N USB_P VBUS
net class J3_Nets: GND GPS_UART_RX GPS_UART_TX
net class J2_Nets: GND NRF_DBG
net class J1_Nets: GND nRESET NRF_DBG SWDCLK SWDIO VSYS
net class ISP1807_Nets: LED_B LED_G LED_R NetC5_2 NetC7_2 NetD3_2 NetD3_3 NetD3_4 NetR17_1 NetR17_2 NetU2_48 NetU2_59 NetU2_65 NetU2_66 NetU2_67 NetU2_68 NetU2_69 NetU2_70 NetU2_71 NetU2_72 NetU2_73 NetU2_74 NetU2_75 NetU2_76 NetU2_77 NetU2_78 nRESET QSPI_CLK QSPI_CS QSPI_IO0 QSPI_IO1 QSPI_IO2 QSPI_IO3 SWDCLK SWDIO
net class Interface_Nets: NetJ4_A5 NetJ4_A8 NetJ4_B5 NetJ4_B8 USB_L_N USB_L_P USB_N USB_P
net class D4_Nets: NetD4_1 VSENS_2
net class D3_Nets: NetD3_2 NetD3_3 NetD3_4 VSYS
net class D2_Nets: NetD2_1 NetD2_2 NetD2_3 NetD2_4
net class D1_Nets: POWER_CONTROL VSYS_EN
net class C49_Nets: GND NetC49_2
net class C47_Nets: GND SMD_ANT
net class C42_Nets: PGND1 VSYS
net class C40_Nets: GND NetBT1_+
net class C39_Nets: GND VSENS_2
net class C45_Nets: GND VSYS
net class C37_Nets: GND VSENS_1
net class C36_Nets: CLAMP2 COIL-2
net class C35_Nets: COIL-2 COMM2
net class C34_Nets: BOOT2 COIL-2
net class C32_Nets: COIL-2 NetC23_1
net class C31_Nets: GND NetC30_1
net class C30_Nets: GND NetC30_1
net class C29_Nets: BOOT1 NetC23_1
net class C28_Nets: COIL-1 NetC23_1
net class C27_Nets: GND RX-OUT
net class C26_Nets: GND RX-OUT
net class C25_Nets: COMM1 NetC23_1
net class C24_Nets: COIL-1 NetC23_1
net class C23_Nets: CLAMP1 NetC23_1
net class C22_Nets: GND VBAT
net class C21_Nets: GND VBAT
net class C20_Nets: GND VBAT
net class C19_Nets: GND VBAT
net class C18_Nets: GND VBUS
net class C17_Nets: GND VBUS
net class C16_Nets: AGND NetC16_1
net class C15_Nets: AGND NetC15_1
net class C14_Nets: AGND NetC14_1
net class C13_Nets: GND VSENS_1
net class C12_Nets: GND VSENS_1
net class C11_Nets: GND VSYS
net class C10_Nets: GND VSENS_2
net class C9_Nets: GND VSYS
net class C8_Nets: GND VSENS_1
net class C7_Nets: GND NetC7_2 VSYS
net class C6_Nets: GND nRESET
net class C5_Nets: GND NetC5_2 VSYS
net class C4_Nets: BAT_AN GND
net class C3_Nets: GND SWS
net class C2_Nets: NetC2_2 PGND4
net class C1_Nets: GND VBAT
net class BT1_Nets: GND NetBT1_+
component class U_linkit-v4: O1 O2 O3 O4 O5 O6 O7 O8 O10 O13 Q1 Q2 R1 R2 R3 R4 R5 R6 R61 R62
component class "TPS63901 3V3&2V31": C41 C42 C55 FB4 L2 R45 R46 R47 U10
component class Sensors: C8 C9 C10 C11 C12 C13 C14 C15 C16 C57 FB1 R26 R27 R28 R30 R32 R51 R54 R56 R63 U4 U5
component class Satellite: "\"" C C47 C49 J11 J12 J13 L3 O14 O15 R65 TP14 TP15 TP16 TP17
component class SAM-M10Q: BT1 C39 C40 C52 C53 D4 R40 R41 R42 R43 R44 R48 U9
component class Power: C1 C2 C44 C56 C58 D1 D2 D5 D6 FB5 FB6 O9 Q3 Q4 R7 R8 R9 R10 R11 R12 R13 R14 R15 R49 R52 R53 R55 R58 SW1 U1
component class ISP1807: C3 C4 C5 C6 C7 D3 J1 MEC1 R16 R17 R19 R20 R21 R22 R23 R24 R25 R57 SW2 U2 U3
component class Interface: C17 C18 C19 C20 C21 C22 C51 D7 D8 D9 D10 J2 J3 J4 J5 J6 J7 J8 J9 J10 J14 J15 L1 MH1 MH2 MH3 MH4 R33 R34 R59 R60 U6
component class "BQ51003YFPT WirelessCharger": C23 C24 C25 C26 C27 C28 C29 C30 C31 C32 C33 C34 C35 C36 C43 FB2 Q5 R35 R36 R37 R38 R39 U7
component class BMA400: C37 C38 U8
differential pair USB: +USB_P -USB_N
differential pair USB_L: +USB_L_P -USB_L_N
differential pair USB_D: +USB_D_P -USB_D_N

## Components (designator, comment, footprint, x,y, rotation, side; value= is the part's Value field where it differs from the comment)
BT1 "6.8MM_COIN_CELL" MS421R_IV03E 3.173,25.392 r0 bottom
C1 "GRM155R61E105KE11D" CAPC1005X55N#1 8.509,4.064 r0 top value=1uF
C2 "GCM188R71C105KA64D" CAPC1608X90N#1 45.593,13.589 r90 top value=1uF (schematic designator C3)
C3 "100NF 0201 35V 10% X5R" CAP0201L 60.96,24.511 r90 bottom value=100nF (schematic designator C4)
C4 "100NF 0201 35V 10% X5R" CAP0201L 62.104,24.752 r180 bottom value=100nF (schematic designator C5)
C5 "YFF15PC0J105MT000N" YFF15PC 66.429,29.576 r180 top (schematic designator C6)
C6 "100NF 0201 35V 10% X5R" CAP0201L 64.008,7.366 r0 top value=100nF (schematic designator C7)
C7 "YFF15PC0J105MT000N" YFF15PC 61.976,18.542 r180 bottom (schematic designator C8)
C8 "GRM155R71C104KA88D" 0402 35.774,12.977 r180 top value=100nF (schematic designator C9)
C9 "1uF" CAPC1005X55N#1 38.06,9.319 r90 top (schematic designator C10)
C10 "GRM155R71C104KA88D" 0402 33.361,10.744 r90 top value=100nF (schematic designator C11)
C11 "1uF" CAPC1005X55N#1 35.774,7.739 r90 top (schematic designator C12)
C12 "1uF" CAPC1005X55N#1 36.245,23.191 r0 top (schematic designator C13)
C13 "GRM155R71C104KA88D" 0402 36.74,24.207 r180 top value=100nF (schematic designator C14)
C14 "GRM1555CYA103GE01D" GRM15x 41.829,26.703 r90 top value=0.01uF (schematic designator C15)
C15 "GRM1555CYA103GE01D" GRM15x 39.129,27.633 r180 top value=0.01uF (schematic designator C16)
C16 "GRM1555CYA103GE01D" GRM15x 36.967,28.038 r90 top value=0.01uF (schematic designator C18)
C17 "1uF" CAPC0603X35N 61.595,17.145 r90 top (schematic designator C19)
C18 "100nF" CAPC0603X33N 61.595,18.796 r270 top value=0.1uF (schematic designator C20)
C19 "GRM31CR61A107MEA8L" CAPC3216X180N 43.815,9.271 r270 top value=100uF (schematic designator C21)
C20 "GRM155R61A106ME11D" CAPC1005X55N#1 45.466,7.112 r90 top value=10uF (schematic designator C22)
C21 "GRM155R61E105KE11D" CAPC1005X55N#1 46.482,7.112 r90 top value=1uF (schematic designator C23)
C22 "GRM155R71C104KA88D" 0402 47.59,6.731 r0 top value=100nF (schematic designator C24)
C23 "GRM188R71E474KA12D" GRM18x#1 55.88,8.255 r180 top value=0.47uF (schematic designator C1)
C24 "GCJ188R71H563KA12J" CAPC1608X90N#1 56.261,5.461 r90 top value=56nF (schematic designator C7)
C25 "GRM155R71E223KA61D" GRM15x 54.737,13.862 r0 top value=0.022uF (schematic designator C2)
C26 "EMK107BBJ106MA-T" CAPC1709X100N 53.702,11.732 r270 top (schematic designator C17)
C27 "GRM155R71C104KA88D" 0402 54.972,12.481 r270 top value=100nF (schematic designator C16)
C28 "GRM188R71H103KA01D" CAPC1608X90N#1 57.658,5.461 r90 top value=0.01uF (schematic designator C6)
C29 "GRM155R71E103KA01D" CAPC1005X70N 56.007,9.652 r180 top value=0.01uF (schematic designator C3)
C30 "EMK107BBJ106MA-T" CAPC1709X100N 63.227,11.636 r90 top (schematic designator C14)
C31 "GRM188R61C475KE11J" CAPC1608X90N#1 61.83,11.586 r90 top value=4.7uF (schematic designator C15)
C32 "GRM155R71H681KA01D" CAPC1005X70N 58.166,7.239 r180 top value=680pF (schematic designator C4)
C33 "GRM155R71H271KA01J" CAPC1005X70N 59.436,5.842 r180 top value=270pF (schematic designator C5)
C34 "GRM155R71E103KA01D" CAPC1005X70N 60.241,9.652 r0 top value=0.01uF (schematic designator C13)
C35 "GRM155R71E223KA61D" GRM15x 61.615,13.862 r180 top value=0.022uF (schematic designator C12)
C36 "GRM188R71E474KA12D" GRM18x#1 60.401,8.255 r0 top value=0.47uF (schematic designator C11)
C37 "100nF" CAPC0603X33N 35.715,20.942 r180 top value=0.1uF (schematic designator C1)
C38 "100nF" CAPC0603X33N 34.537,17.252 r90 top value=0.1uF (schematic designator C2)
C39 "100nF" CAPC0603X33N 19.248,26.8 r0 top value=0.1uF (schematic designator C1)
C40 "100nF" CAPC0603X33N 7.874,18.034 r90 top value=0.1uF (schematic designator C4)
C41 "" GRM18x#2 -1241.446,1302.673 r180 bottom value=22uF (schematic designator C2)
C42 "" GRM18x#1 50.1,25.1 r180 top value=22uF (schematic designator C3)
C43 "C0603C123K5RACTU" CAPC1608X90N#1 54.61,5.461 r90 top value=12nF (schematic designator C8)
C44 "GCM188R71C105KA64D" CAPC1608X90N#1 45.522,18.923 r90 top value=1uF (schematic designator C26)
C45 "1uF" CAPC1005X55N#1 40.64,7.493 r180 bottom (schematic designator C28)
C46 "GRM155R71C104KA88D" 0402 36.1,8.333 r270 bottom value=100nF (schematic designator C29)
C47 "NC" CAPC1005X55N#1 7.892,13.731 r90 bottom (schematic designator C25)
C48 "" GRM18x#2 1320.525,1290.9 r0 top value=22uF (schematic designator C2)
C49 "NC" CAPC1005X55N#1 4.555,13.731 r90 bottom (schematic designator C27)
C50 "" GRM18x#1 28.194,28.575 r180 bottom value=22uF (schematic designator C3)
C51 "HS1025-3R8706-R" HS1025-3R8706-R 52.89,-0.626 r180 bottom value=70F (schematic designator C30)
C52 "GRM188R61A106MAALJ" CAPC1608X90N#2 -1250.282,-1242.26 r180 top value=10uF (schematic designator C2)
C53 "" GRM18x#2 -1250.407,-1240.7 r180 top value=22uF (schematic designator C3)
C55 "GRM188R61A106MAALJ" CAPC1608X90N#2 1320.1,1296.3 r0 top value=10uF (schematic designator C4)
C56 "GRM155R61H105ME05J" GRM15x 55.014,0.625 r0 bottom value=1uF (schematic designator C2)
C57 "GRM1555CYA103GE01D" GRM15x 36.626,26.203 r90 top value=0.01uF (schematic designator C17)
C58 "GRM155R61H105ME05J" GRM15x 46.228,10.922 r180 top value=1uF (schematic designator C32)
C59 "1uF" CAPC1005X55N#2 1307.229,1277.816 r90 bottom (schematic designator C31)
C61 "GRM188R61A106MAALJ" CAPC1608X90N#1 27.995,27.419 r0 bottom value=10uF (schematic designator C4)
D1 "RB751S40" SODFL1608X65N 22.352,1.93 r0 top
D2 "APHF1608LSEEQBDZGKC" "LED RGB 0603" 40.767,20.066 r270 top
D3 "APHF1608LSEEQBDZGKC" "LED RGB 0603" 42.672,20.092 r270 top
D4 "PMEG4005EJ" SOD2512X80N 3.173,21.074 r180 bottom (schematic designator D1)
D5 "PMEG4010CEAX" SOD2512X110N 51.435,8.255 r270 top (schematic designator D4)
D6 "PMEG4010CEAX" SOD2512X110N 51.435,12.185 r90 top (schematic designator D5)
D7 "ESD9L5.0ST5GH" SODFL1006X40N 46.101,30.099 r270 bottom (schematic designator D6)
D8 "ESD9L5.0ST5GH" SODFL1006X40N 39.751,32.639 r180 bottom (schematic designator D7)
D9 "PESD12VS1UL,315" PESD5V0S1BL315 59.182,4.572 r0 top (schematic designator D8)
D10 "PESD12VS1UL,315" PESD5V0S1BL315 61.843,4.572 r180 top (schematic designator D9)
FB1 "BLM18HE601SN1D" BLM18SP221SN1B 43.688,28.321 r0 top
FB2 "BLM18AG102SN1D" BLM18SP221SN1B 58.175,9.402 r270 top (schematic designator FB1)
FB3 "BLM18AG102SN1D" BLM18SP221SN1B 34.767,30.734 r0 bottom (schematic designator FB1)
FB4 "BLM18AG102SN1D" BLM18SP221SN1B 46.504,26.965 r180 top (schematic designator FB1)
FB5 "BLM18AG102SN1D" BLM18SP221SN1B 56.515,4.699 r0 bottom (schematic designator FB2)
FB6 "BLM18AG102SN1D" BLM18SP221SN1B 43.942,12.954 r90 top (schematic designator FB3)
J1 "TC2030-NL" TC2030NL 68.101,30.816 r270 bottom (schematic designator J2)
J2 "860-10-002-10-001101" 8601000210001101 48.911,33.02 r0 top (schematic designator J1)
J3 "BC020-03-A-0200-0300-L-G" BC02003A02000300LG 28.845,1.905 r180 top (schematic designator J4)
J4 "USB4215-03-A_REVA" GCT_USB4215-03-A_REVA 67.818,19.941 r90 top (schematic designator J5)
J5 "B2B-XH-A-GU" B2BXHAGU 46.792,2.501 r0 top (schematic designator J8)
J6 "DF52-12S-0.8H_21_" DF5212S08H21 33.954,32.968 r180 top (schematic designator J9)
J7 "M20-9990245" "HDR 2POS 2.54MM THRU HOLE" 59.67,2.499 r0 top (schematic designator J10)
J8 "BM04B-GHS-TBT_LF__SN__N_" CONN_BM04B-GHS-TBT_JST 66.929,10.541 r270 bottom (schematic designator J11)
J9 "PRT-14417" SPARKFUN_PRT-14417 67.437,19.939 r270 bottom (schematic designator J12)
J10 "M20-9990245" "HDR 2POS 2.54MM THRU HOLE" 45.212,32.893 r180 top locked (schematic designator J13)
J11 "U.FL-R-SMT-1_10_" U.FL-R-SMT-1(10) 1.524,14.377 r90 bottom locked (schematic designator J14)
J12 "TC2030-NL" TC2030NL 37.084,2.159 r0 bottom (schematic designator J15)
J13 "SMA_T_9.52_NF" CO_SAMTEC_SMA-J-P-ST-EMI 0,14.351 r90 bottom locked (schematic designator J17)
J14 "BC020-03-A-0200-0300-L-G" BC02003A02000300LG 23.901,33.451 r180 bottom (schematic designator J7)
J15 "M20-9990245" "HDR 2POS 2.54MM THRU HOLE" 53.721,2.413 r0 top (schematic designator J6)
L1 "744232090" WE-CNSW-SMD 59.936,23.198 r90 top
L2 "DFE252012F-2R2M=P2" DFE2HCAH1R0MJ0L 53.282,23.495 r90 top value=2.2uH (schematic designator L1)
L3 "10nH" LQW18AN10NG80D 6.247,14.351 r180 bottom (schematic designator L2)
L4 "DFE252012F-2R2M=P2" DFE2HCAH1R0MJ0L 31.527,30.672 r270 bottom value=2.2uH (schematic designator L1)
MEC1 "VLP-400-F" VLP-400-F 41.783,20.066 r90 top
MH1 "Mounting Hole M2" "MOUNTING HOLE M2 UNPLATED" 66.675,32.385 r0 top
MH2 "Mounting Hole M2 Plated" "Mounting Hole M2 Plated" 3.302,3.302 r0 top
MH3 "Mounting Hole M2 Plated" "Mounting Hole M2 Plated" 3.302,31.75 r0 top
MH4 "Mounting Hole M2 Plated" "Mounting Hole M2 Plated" 66.675,3.302 r0 top
O1 "NC" SMT-JUMPER_2_NC_TRACE_SILK 49.149,27.305 r0 bottom net-tie
O2 "NC" SMT-JUMPER_2_NC_TRACE_SILK 30.48,28.702 r90 top net-tie
O3 "NC" SMT-JUMPER_2_NC_TRACE_SILK 33.909,28.702 r90 top net-tie
O4 "NC" SMT-JUMPER_2_NC_TRACE_SILK 32.131,28.702 r90 top net-tie
O5 "NC" SMT-JUMPER_2_NC_TRACE_SILK 54.132,6.657 r0 bottom net-tie
O6 "NC" SMT-JUMPER_2_NC_TRACE_SILK 44.831,30.099 r0 top net-tie
O7 "NO" SMT-JUMPER_2_NO_TRACE_SILK 57.15,6.731 r180 bottom net-tie
O8 "NO" SMT-JUMPER_2_NO_TRACE_SILK 42.291,30.099 r180 top net-tie
O9 "NC" SMT-JUMPER_2_NC_TRACE_SILK 45.012,23.92 r180 top net-tie
O10 "NO" SMT-JUMPER_2_NO_TRACE_SILK 26.543,29.21 r270 top net-tie (schematic designator O15)
O11 "NC-Left" SMT-JUMPER_3_2-NCLEFT_TRACE_SILK 33.274,5.461 r0 bottom net-tie (schematic designator O10)
O13 "NO" SMT-JUMPER_2_NO_TRACE_SILK 30.607,25.654 r90 top net-tie (schematic designator O14)
O14 "NO" SMT-JUMPER_2_NO_TRACE_SILK 43.18,10.922 r270 bottom net-tie (schematic designator O13)
O15 "NC-Left" SMT-JUMPER_3_2-NCLEFT_TRACE_SILK 38.964,5.207 r0 bottom net-tie (schematic designator O18)
Q1 "MMBT3904LT1G" SOT96P237X111-3N#1 57.434,15.801 r0 bottom
Q2 "DMP2305U-7" SOT96P240X115-3N 58.196,10.721 r270 bottom
Q3 "NTR4171PT1G" SOT96P237X111-3N#2 19.05,1.93 r0 top value=75MΩ
Q4 "NTR4171PT1G" SOT96P237X111-3N#2 14.491,1.84 r0 top value=75MΩ
Q5 "CSD75208W1015" BGA6C50P2X3_95X145X62 57.785,18.161 r270 top (schematic designator Q1)
R1 "4.7K 0201 1% 100PPM" RES0201L 33.02,15.875 r270 top value=4.7K
R2 "4.7K 0201 1% 100PPM" RES0201L 33.782,15.875 r270 top value=4.7K
R3 "1kR" RESC0603X28N 54.132,14.846 r180 bottom value=1KR
R4 "CRCW040210K0JNEDC" RESC1005X40N 58.45,13.388 r180 bottom value=10kR
R5 "ERA-3AEB124V" ERA3AEB101V 59.593,6.784 r270 bottom value=120kR
R6 "ERA-3AEB304V" ERA3AEB101V 55.275,9.832 r270 bottom value=300kR
R7 "CRG0402F1M0" RESC1005X40N 15.748,1.016 r180 bottom value=1MR
R8 "RC0201FR-7D1ML" RESC0603X26N#1 1318.248,1290.066 r0 top value=1MR
R9 "RC0201FR-7D1ML" RESC0603X26N#1 -1222.548,-1247.163 r180 top value=1MR
R10 "ERJ-U02F1002X" ERJS02_U02_(0402) 49.149,10.033 r90 top value=10kR
R11 "CRCW0201383RFNED" RESC0603X28N 48.01,10.033 r90 top value=383R
R12 "CRCW020127K4FNED" RESC0603X28N 48.006,15.875 r270 top value=27.4kR
R13 "RC0402JR-7D1KL" RESC1005X40N 38.354,21.59 r90 top value=1kR
R14 "RC0402JR-7D330RL" RESC1005X40N 37.846,19.457 r0 top value=330R
R15 "CRCW04021K60JNED" RESC1005X40N 41.492,15.875 r270 top value=1.6kR
R16 "10K 0201 1% 100PPM" RES0201L 64.008,8.255 r180 top value=10K
R17 "0R 0201" RES0201N 62.58,29.879 r0 top value=0R
R19 "RC0201FR-7D1ML" RESC0603X26N#2 49.657,22.819 r90 bottom value=1MR
R20 "RC0201FR-7D1ML" RESC0603X26N#2 41.148,9.865 r90 bottom value=1MR
R21 "RC0201FR-7D1ML" RESC0603X26N#2 34.079,8.322 r90 top value=1MR
R22 "RC0201FR-7D1ML" RESC0603X26N#2 54.188,15.748 r180 bottom value=1MR
R23 "750R 0201 1% 100PPM" RES0201L 45.212,21.183 r90 top value=750R
R24 "330R 0201 1% 100PPM" RES0201L 43.307,16.129 r180 top value=330R
R25 "1.6K 0201 1% 100PPM" RES0201L 43.307,16.891 r180 top value=1.6K
R26 "Resistor" R0402 17.018,6.223 r90 top value=NF
R27 "1kR" RESC0603X28N 42.718,26.64 r270 top value=1KR
R28 "RC0201FR-7D1ML" RESC0603X26N#2 41.402,24.384 r90 top value=1MR
R30 "1kR" RESC0603X28N 40.016,28.522 r180 top value=1KR
R32 "1kR" RESC0603X28N 35.987,27.975 r270 top value=1KR (schematic designator R33)
R33 "CRCW02015K10JNED" RESC0603X28N 64.516,26.416 r270 top value=5.1kR (schematic designator R35)
R34 "CRCW02015K10JNED" RESC0603X28N 60.401,16.764 r90 top value=5.1kR (schematic designator R36)
R35 "DNP" RESC1005X40N 54.483,17.018 r270 top value=0R (schematic designator R5)
R36 "CRCW020120K0FKED" RESC0603X28N 58.109,15.494 r0 top value=20kR (schematic designator R2)
R37 "RC0201FR-7D10KL" RESC0603X26N#2 60.741,15.132 r0 top value=10KR (schematic designator R4)
R38 "ERJ-1GNF2550C" RESC0603X28N 58.937,16.44 r0 top value=255R (schematic designator R1)
R39 "CRCW0201196RFKED" RESC0603X28N 56.642,15.621 r270 top value=196R (schematic designator R3)
R40 "ERJ-U02F4700X" ERJS02_U02_(0402) 29.201,20.32 r0 top value=470R (schematic designator R1)
R41 "CRCW04023K30FKED" RESC1005X40N 6.729,21.074 r180 bottom value=3.3KR (schematic designator R2)
R42 "ERJ-U02F4700X" ERJS02_U02_(0402) 29.201,18.415 r0 top value=470R (schematic designator R3)
R43 "ERJ-U02F22R0X" ERJS02_U02_(0402) 29.201,16.515 r0 top value=22R (schematic designator R4)
R44 "ERJ-U02F22R0X" ERJS02_U02_(0402) 18.918,6.223 r90 top value=22R (schematic designator R5)
R45 "CRCW020136K5FNED" RESC0603X28N 47.375,21.498 r180 top value=36.5KR (schematic designator R1)
R46 "RC0201FR-070RL" RESC0603X26N#2 47.51,23.709 r180 top value=0R (schematic designator R2)
R47 "RC0201FR-070RL" RESC0603X26N#2 47.266,25.149 r270 top value=0R (schematic designator R3)
R48 "ERJ-PA2F1003X" ERJPA2_(0402) 17.5,27.94 r180 top value=100KR (schematic designator R6)
R49 "CRCW040249K9FKED" RESC1005X40N 12.192,4.191 r180 top value=49.9kR (schematic designator R37)
R51 "1kR" RESC0603X28N 35.864,26.14 r270 top value=1KR (schematic designator R32)
R52 "CRCW04020000Z0EEHP" RESC1005X40N 51.816,17.526 r0 top value=0R (schematic designator R38)
R53 "CRCW04020000Z0EEHP" RESC1005X40N 47.752,17.526 r0 top value=0R (schematic designator R39)
R54 "4.7K 0201 1% 100PPM" RES0201L 31.877,21.209 r90 top value=4.7K (schematic designator R40)
R55 "CRCW04020000Z0EEHP" RESC1005X40N 49.784,18.161 r90 top value=0R (schematic designator R41)
R56 "4.7K 0201 1% 100PPM" RES0201L 34.798,16.002 r0 top value=4.7K (schematic designator R42)
R57 "RC0201FR-7D1ML" RESC0603X26N#2 37.465,12.36 r270 top value=1MR (schematic designator R43)
R58 "RC0201FR-0710ML" RESC0603X26N#2 23.114,3.978 r270 top value=10MR (schematic designator R44)
R59 "RC0201FR-7D1ML" RESC0603X26N#2 46.99,30.259 r270 bottom value=1MR (schematic designator R45)
R60 "RC0201FR-7D1ML" RESC0603X26N#2 39.837,33.655 r180 bottom value=1MR (schematic designator R46)
R61 "4.7K 0201 1% 100PPM" RES0201L 62.8,11.4 r90 bottom value=4.7K (schematic designator R48)
R62 "4.7K 0201 1% 100PPM" RES0201L 62.8,9.6 r90 bottom value=4.7K (schematic designator R49)
R63 "CRCW0201100KJNED" RESC0603X28N 33.401,24.034 r90 top value=100kR (schematic designator R47)
R65 "0R" RESC1005X40N 43.815,4.953 r270 bottom value=0mR (schematic designator R52)
R66 "RC0201FR-7D1ML" RESC0603X26N#2 21.9,32 r270 bottom value=1MR (schematic designator R53)
R67 "RC0201FR-7D1ML" RESC0603X26N#2 19.902,29.988 r315 bottom value=1MR (schematic designator R54)
R68 "CRCW020136K5FNED" RESC0603X28N 31.242,33.147 r180 bottom value=36.5KR (schematic designator R1)
R69 "RC0201FR-070RL" RESC0603X26N#2 24.13,31.201 r270 bottom value=0R (schematic designator R2)
R70 "RC0201FR-070RL" RESC0603X26N#2 25.908,29.845 r90 bottom value=0R (schematic designator R3)
SW1 "CT8132BV-IS3" SOT95P280X140-3N 10.16,1.905 r180 top
SW2 "PTS820J2x" TL1015 67.056,9.525 r270 top
TP14 "TP-SMD-RFBUSY" TP_simplepad#1 24.1,2.787 r270 bottom
TP15 "TP-SMD-RFNRST" TP_simplepad#2 25.581,4.214 r135 bottom
TP16 "TP-SMD-SDA" TP_simplepad#1 34.32,12.709 r270 bottom
TP17 "TP-SMD-SCL" TP_simplepad#2 32.937,11.221 r135 bottom
U1 "BQ25176MDSGR" SON50P200X200X80-9N 48.26,12.827 r90 top
U2 "ISP1807-LR" ISP1807-LR 60.96,30.099 r0 bottom
U3 "IS25LP128F-JKLE" SON127P600X80_HS-9N 57.404,20.828 r0 bottom
U4 "TPS22960RSER" TPS22960RSER 35.774,10.279 r180 top
U5 "ADS1115IRUGR" ADS1115IRUGR 39.159,25.478 r90 top
U6 "USBLC6-2SC6" SOT95P280X145-6N 59.935,27.478 r90 top (schematic designator U7)
U7 "BQ51003YFPT" BGA28C40P4X7_188X301X50 58.201,12.592 r180 top (schematic designator U1)
U8 "BMA400" LGA12-BMA400 34.29,19.304 r0 top (schematic designator U1)
U9 "SAM-M10Q-00B" SAMM10Q00B 17.018,18.415 r0 top (schematic designator U1)
U10 "TPS63901YCJR" BGA12C35P3X4_111X146X35 49.828,23.232 r180 top (schematic designator U1)
U11 "TPS22916BYFPR" BGA4C40P2X2_78X78X50 38.954,8.975 r0 bottom (schematic designator U6)
U12 "stm32wl-SMD" stm32wl-SMD_noLegs 36.38,16.138 r225 bottom (schematic designator U9)
U13 "TPS63901YCJR" BGA12C35P3X4_111X146X35 28.041,30.594 r180 bottom (schematic designator U1)

## Footprints (in the part's own frame and the unit in brackets; to place one, negate y for a bottom-side part, rotate by r counter-clockwise, add the part's x,y. Pads: shape width x height; smd on the part's side, far side on the other; paste and mask are expansions set on the pad)
0402 [mm]
  rect 0.7x0.7 smd: 1(0.035,0) 2(1.233,0)
  body extent -0.38,-0.36 1.65,0.36, height 0.82
8601000210001101 [mm]
  rect 0.85x0.85 hole 0.6: 1(0,0)
  round 0.85 hole 0.6: 2(1,0)
  silkscreen extent -1.6,-1 2,1, body extent -1,-1 2,1, height 3.73
ADS1115IRUGR [mm]
  rect 0.3x0.575 smd: 1(-0.75,-0.638) 4(0.75,-0.638) 6(0.75,0.638) 9(-0.75,0.638)
  rect 0.25x0.575 smd: 2(-0.25,-0.638) 3(0.25,-0.638) 7(0.25,0.638) 8(-0.25,0.638)
  rect 0.63x0.35 smd: 5(0.86,0) 10(-0.86,0)
  silkscreen extent -1,-1.25 -0.9,-1.15, body extent -1,-0.75 1,0.75, height 0.4
B2BXHAGU [mm]
  rect 1.5x1.5 hole 1: 1(0,0)
  round 1.5 hole 1: 2(2.5,0)
  silkscreen extent -3.2,-2.35 4.95,3.4, body extent -2.45,-2.36 4.95,3.39, height 7.55
BC02003A02000300LG [mm]
  round 0.75 hole 0.5: 1(-1,0) 2(0,0) 3(1,0)
  silkscreen extent -2.1,-0.05 -2,0.05, body extent -1.5,-0.64 1.5,0.64, height 3.3
BGA4C40P2X2_78X78X50 [mm]
  round 0.226 smd: A1(-0.2,0.2) A2(0.2,0.2) B1(-0.2,-0.2) B2(0.2,-0.2)
  silkscreen extent -0.76,-0.66 0.66,0.76, body extent -0.39,-0.39 0.39,0.39, height 0.5
BGA6C50P2X3_95X145X62 [mm]
  round 0.298 smd: A1(-0.25,0.5) A2(0.25,0.5) B1(-0.25,0) B2(0.25,0) C1(-0.25,-0.5) C2(0.25,-0.5)
  silkscreen extent -0.85,-1 0.75,1.1, body extent -0.48,-0.72 0.48,0.72, height 0.63
BGA12C35P3X4_111X146X35 [mm]
  round 0.169 smd: A1(-0.35,0.525) A2(0,0.525) A3(0.35,0.525) B1(-0.35,0.175) B2(0,0.175) B3(0.35,0.175) C1(-0.35,-0.175) C2(0,-0.175) C3(0.35,-0.175) D1(-0.35,-0.525) D2(0,-0.525) D3(0.35,-0.525)
  silkscreen extent -0.88,-0.96 0.78,1.06, body extent -0.56,-0.73 0.56,0.73, height 0.35
BGA28C40P4X7_188X301X50 [mm]
  round 0.226 smd: A1(-0.6,1.2) A2(-0.2,1.2) A3(0.2,1.2) A4(0.6,1.2) B1(-0.6,0.8) B2(-0.2,0.8) B3(0.2,0.8) B4(0.6,0.8) C1(-0.6,0.4) C2(-0.2,0.4) C3(0.2,0.4) C4(0.6,0.4) D1(-0.6,0) D2(-0.2,0) D3(0.2,0) D4(0.6,0) E1(-0.6,-0.4) E2(-0.2,-0.4) E3(0.2,-0.4) E4(0.6,-0.4) F1(-0.6,-0.8) F2(-0.2,-0.8) F3(0.2,-0.8) F4(0.6,-0.8) G1(-0.6,-1.2) G2(-0.2,-1.2) G3(0.2,-1.2) G4(0.6,-1.2)
  silkscreen extent -1.16,-1.66 1.06,1.76, body extent -0.94,-1.5 0.94,1.5, height 0.5
BLM18SP221SN1B [mm]
  rect 0.65x0.7 smd: 1(-0.675,0) 2(0.675,0)
  silkscreen extent 0,-0.3 0,0.3, body extent -0.8,-0.4 0.8,0.4, height 0.8
CAP0201L [mm]
  rect 0.36x0.32 smd: 1(-0.28,0) 2(0.28,0)
  body extent -0.31,-0.16 0.31,0.16, height 0.3
CAPC0603X33N [mm]
  rect 0.46x0.42 smd: 1(-0.33,0) 2(0.33,0)
  body extent -0.3,-0.15 0.3,0.15, height 0.33
CAPC0603X35N [mm]
  rect 0.46x0.42 smd: 1(-0.33,0) 2(0.33,0)
  body extent -0.3,-0.15 0.3,0.15, height 0.35
CAPC1005X55N#1 [mm]
  rect 0.6x0.62 smd: 1(-0.46,0) 2(0.46,0)
  body extent -0.5,-0.25 0.5,0.25, height 0.55
CAPC1005X55N#2 [mm]
  rect 0.6x0.62 smd: 1(-1270.46,-1270) 2(-1269.54,-1270)
  body extent -1270.5,-1270.25 -1269.5,-1269.75, height 0.55
CAPC1005X70N [mm]
  rect 0.69x0.72 smd: 1(-0.46,0) 2(0.46,0)
  body extent -0.5,-0.25 0.5,0.25, height 0.7
CAPC1608X90N#1 [mm]
  rect 0.75x0.94 smd: 1(-0.7,0) 2(0.7,0)
  body extent -0.8,-0.45 0.8,0.45, height 0.8
CAPC1608X90N#2 [mm]
  rect 0.54x0.94 smd: 1(-1270.8,-1270) 2(-1269.2,-1270)
  silkscreen extent -1270,-1270.3 -1270,-1269.7, body extent -1270.8,-1270.4 -1269.2,-1269.6, height 0.8
CAPC1709X100N [mm]
  rect 0.81x1.04 smd: 1(-0.72,0) 2(0.72,0)
  body extent -0.85,-0.45 0.85,0.45, height 1
CAPC3216X180N [mm]
  rect 1.07x1.82 smd: 1(-1.38,0) 2(1.38,0)
  silkscreen extent 0,-0.7 0,0.7, body extent -1.6,-0.8 1.6,0.8, height 1.8
CO_SAMTEC_SMA-J-P-ST-EMI [mm] "SMA Jack CMS, Edge Mountt Receptacle 50Ohm, 5-Leads, Body 6.35x6.35x9.52mm, pitch 2.825mm"
  rect 1.27x0 smd mask+0: 1(0,1.9)
  rect 1.35x4.2 smd far side mask+0.05: 2(-2.825,2.1) 2(2.825,2.1)
  rect 1.35x4.2 smd mask+0.05: 2(-2.825,2.1) 2(2.825,2.1)
  silkscreen extent -1.8,3.95 1.8,3.95, body extent -3.17,-10.13 3.18,3.2, height 3.8
CONN_BM04B-GHS-TBT_JST [mil]
  rect 26x67 smd: 1(-73.82,77.82) 2(-24.61,77.82) 3(24.61,77.82) 4(73.82,77.82)
  rect 43x114 smd: MP1(146.65,-54.07) MP2(-146.65,-54.07)
  silkscreen extent -252,-103 168,102, body extent -162,-84 162,111, height 159
DF5212S08H21 [mm]
  rect 0.5x1 smd: 1(-4.4,1.345) 2(-3.6,1.345) 3(-2.8,1.345) 4(-2,1.345) 5(-1.2,1.345) 6(-0.4,1.345) 7(0.4,1.345) 8(1.2,1.345) 9(2,1.345) 10(2.8,1.345) 11(3.6,1.345) 12(4.4,1.345)
  rect 0.9x1.6 smd: 13(-5.65,-0.575) 14(5.65,-0.575)
  silkscreen extent -5.9,-1.38 5.9,1.38, body extent -5.9,-1.16 5.9,1.61, height 1.75
DFE2HCAH1R0MJ0L [mm]
  rect 0.85x2.2 smd: 1(-1.025,0) 2(1.025,0)
  silkscreen extent 0,-1 0,1, body extent -1.25,-1 1.25,1, height 1.2
ERA3AEB101V [mm]
  rect 0.65x0.9 smd: 1(-0.725,0) 2(0.725,0)
  silkscreen extent -1.35,-0.05 -1.25,0.05, body extent -0.8,-0.4 0.8,0.4, height 0.45
ERJPA2_(0402) [mm]
  rect 0.475x0.5 smd: 1(-0.513,0) 2(0.513,0)
  body extent -0.5,-0.25 0.5,0.25, height 0.35
ERJS02_U02_(0402) [mm]
  rect 0.475x0.5 smd: 1(-0.513,0) 2(0.513,0)
  silkscreen extent -1.16,-0.05 -1.06,0.05, body extent -0.5,-0.25 0.5,0.25, height 0.35
GCT_USB4215-03-A_REVA [mm]
  rect 0.6x1.15 smd: A1_B12(-3.2,4.575) A4_B9(-2.4,4.575) B1_A12(3.2,4.575) B4_A9(2.4,4.575)
  rect 0.3x1.15 smd: A5(-1.25,4.575) A6(-0.25,4.575) A7(0.25,4.575) A8(1.25,4.575) B5(1.75,4.575) B6(0.75,4.575) B7(-0.75,4.575) B8(-1.75,4.575)
  oval 1x2.2 hole 0.6 slot 1.8 at 90 deg: SHIELD(-4.32,0) SHIELD(4.32,0)
  oval 1x1.8 hole 0.6 slot 1.4 at 90 deg: SHIELD(-4.32,4) SHIELD(4.32,4)
  silkscreen extent -4.47,-2.08 4.47,5.8, body extent -4.47,-2.03 4.47,4.72, height 3.28
GRM15x [mm]
  rect 0.45x0.6 smd: 1(-0.475,0) 2(0.475,0)
  silkscreen extent -1.05,-0.05 -0.95,0.05, body extent -0.5,-0.28 0.5,0.27, height 0.5
GRM18x#1 [mm]
  rect 0.65x0.7 smd: 1(-0.675,0) 2(0.675,0)
  silkscreen extent 0,-0.4 0,0.4, body extent -0.8,-0.45 0.8,0.45, height 0.8
GRM18x#2 [mm]
  rect 0.65x0.7 smd: 1(-1270.675,-1270) 2(-1269.325,-1270)
  silkscreen extent -1270,-1270.4 -1270,-1269.6, body extent -1270.8,-1270.45 -1269.2,-1269.55, height 0.8
"HDR 2POS 2.54MM THRU HOLE" [mm]
  rect 1.9x1.9 hole 1: 1(0,0)
  round 1.9 hole 1: 2(2.54,0)
  silkscreen extent -1.25,-1.27 3.83,1.27, body extent -1.25,-1.27 3.83,1.27, height 8.65
HS1025-3R8706-R [mil]
  rect 60x60 hole 30 square: 1(78.35,190)
  round 60 hole 30: 2(275,190)
  body extent -23,-9 379,392, height 1185